# Altium PCB ISL6236A_DEMO_PCB_V1I1.PcbDoc
Units mm, origin at the board's own origin, x right, y up, seen from the top; angles counter-clockwise.
Board outline 50 x 50 mm, 6 copper layers (L1, L2, L3, L4, L5, L6), stack 0.816 mm thick; 41 components, 27 nets, 119 pads, 94 vias.
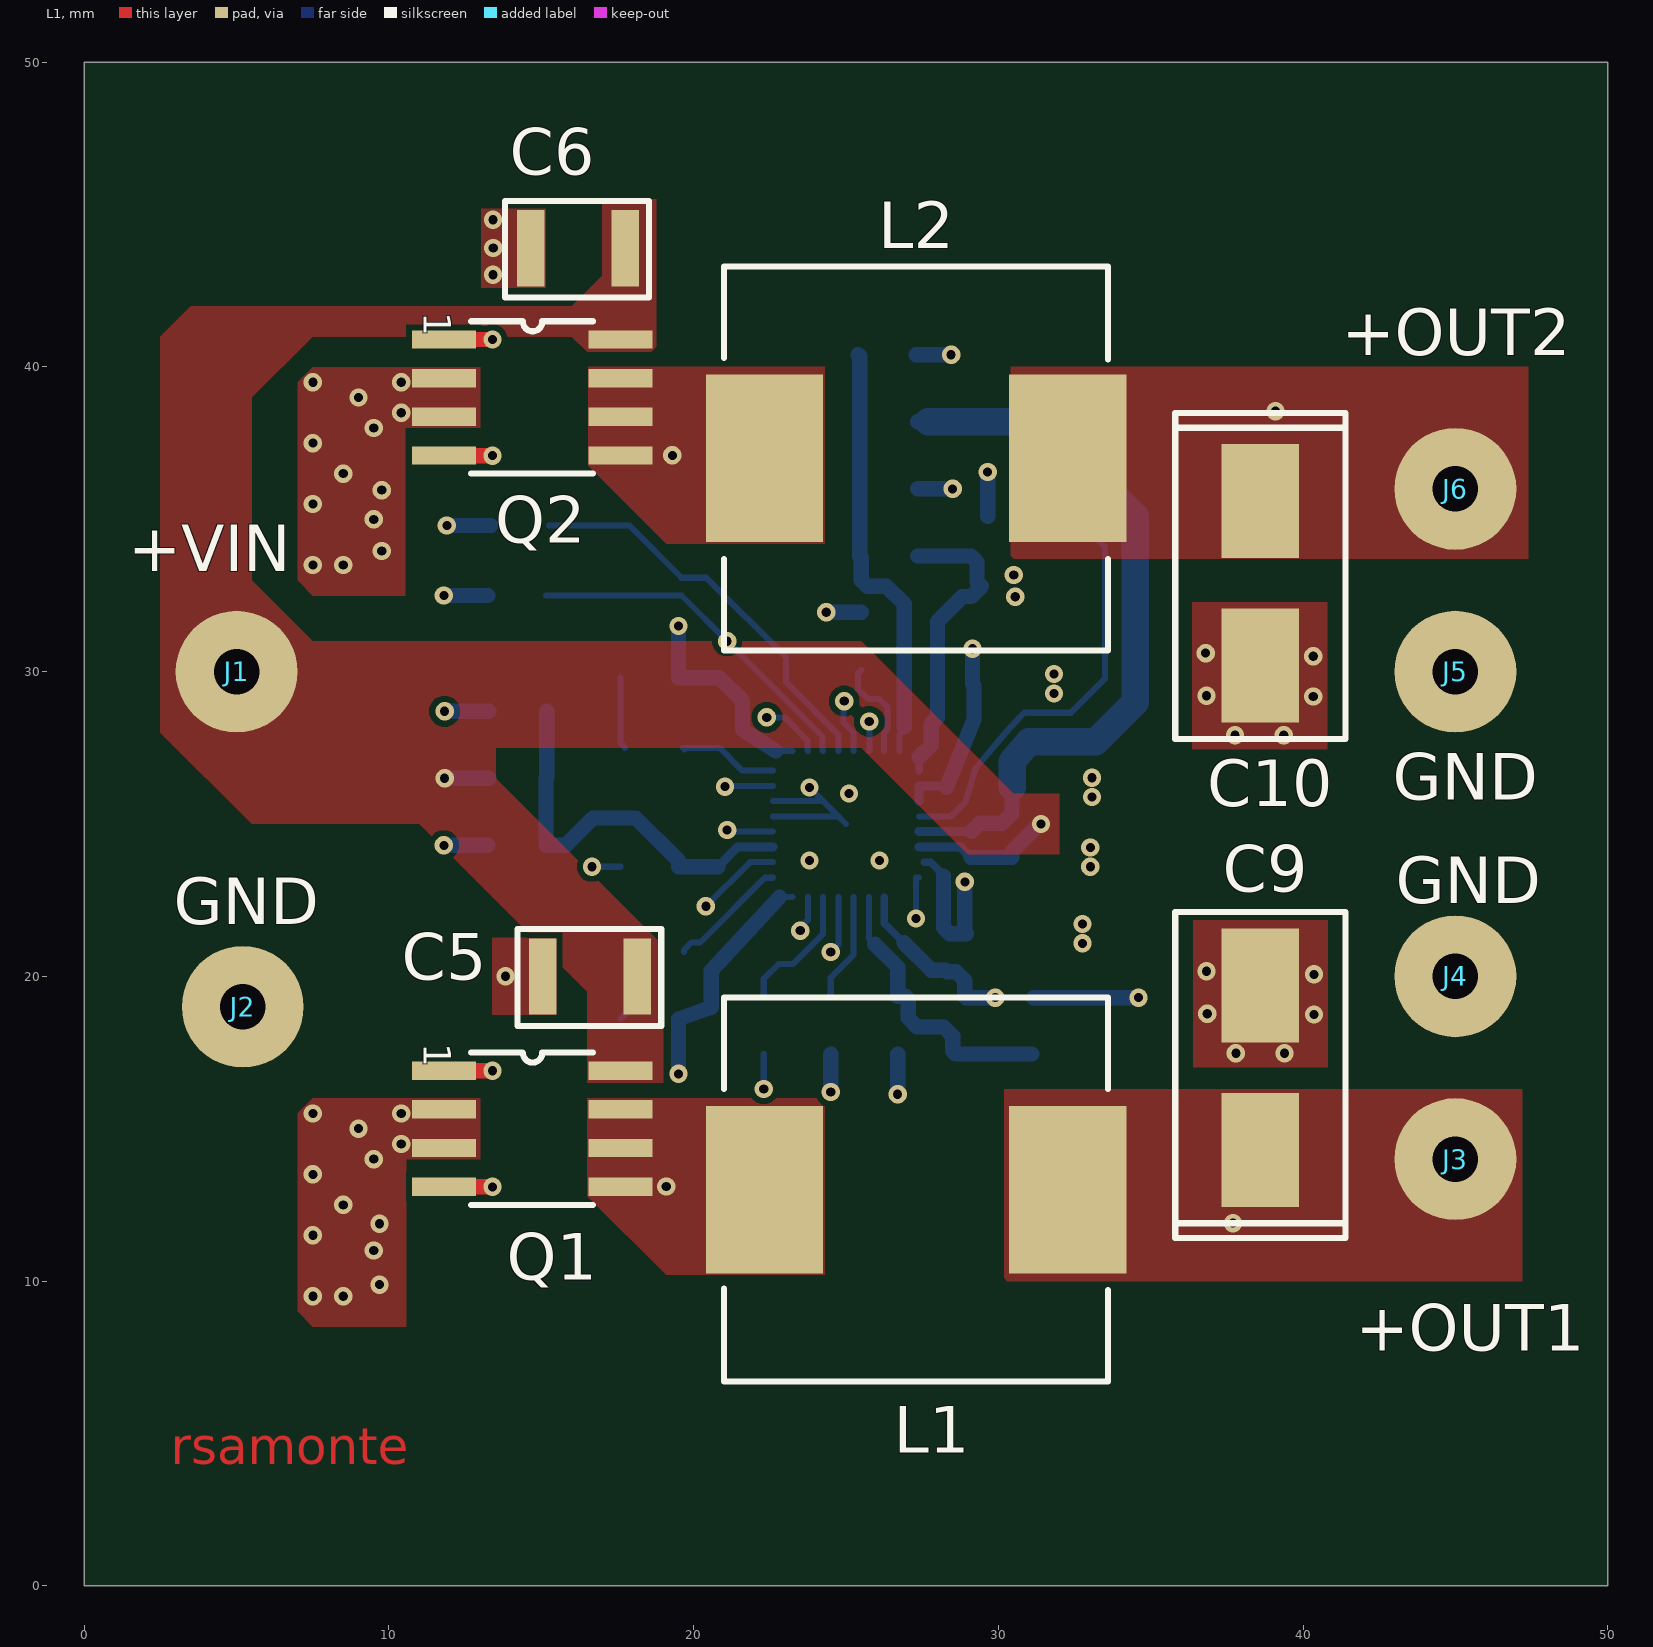
[diagram p0: L1 view]
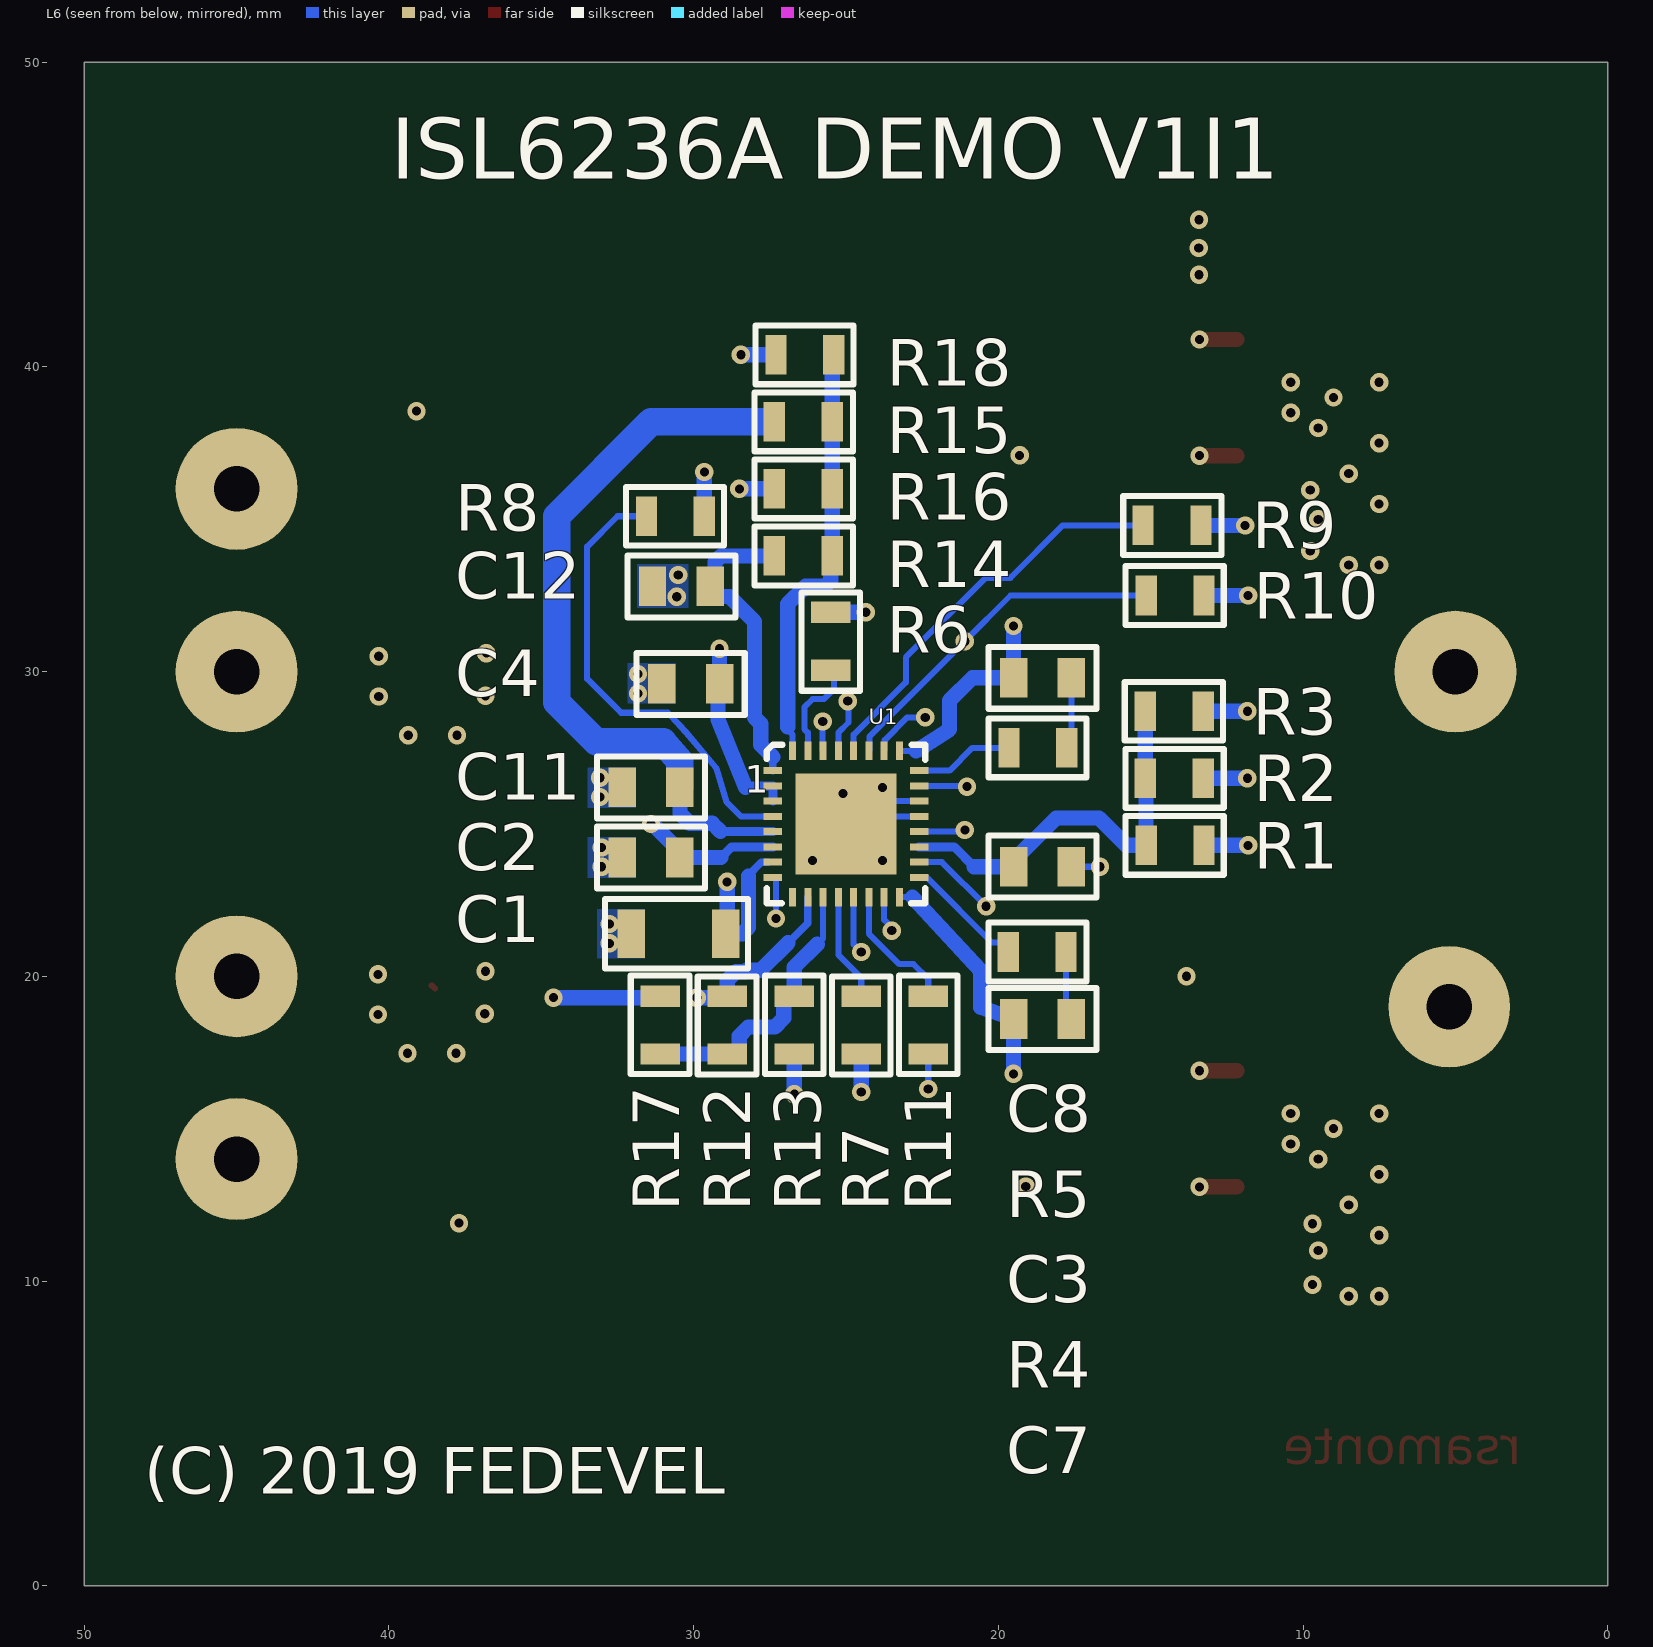
[diagram p1: L6 view, seen from below]
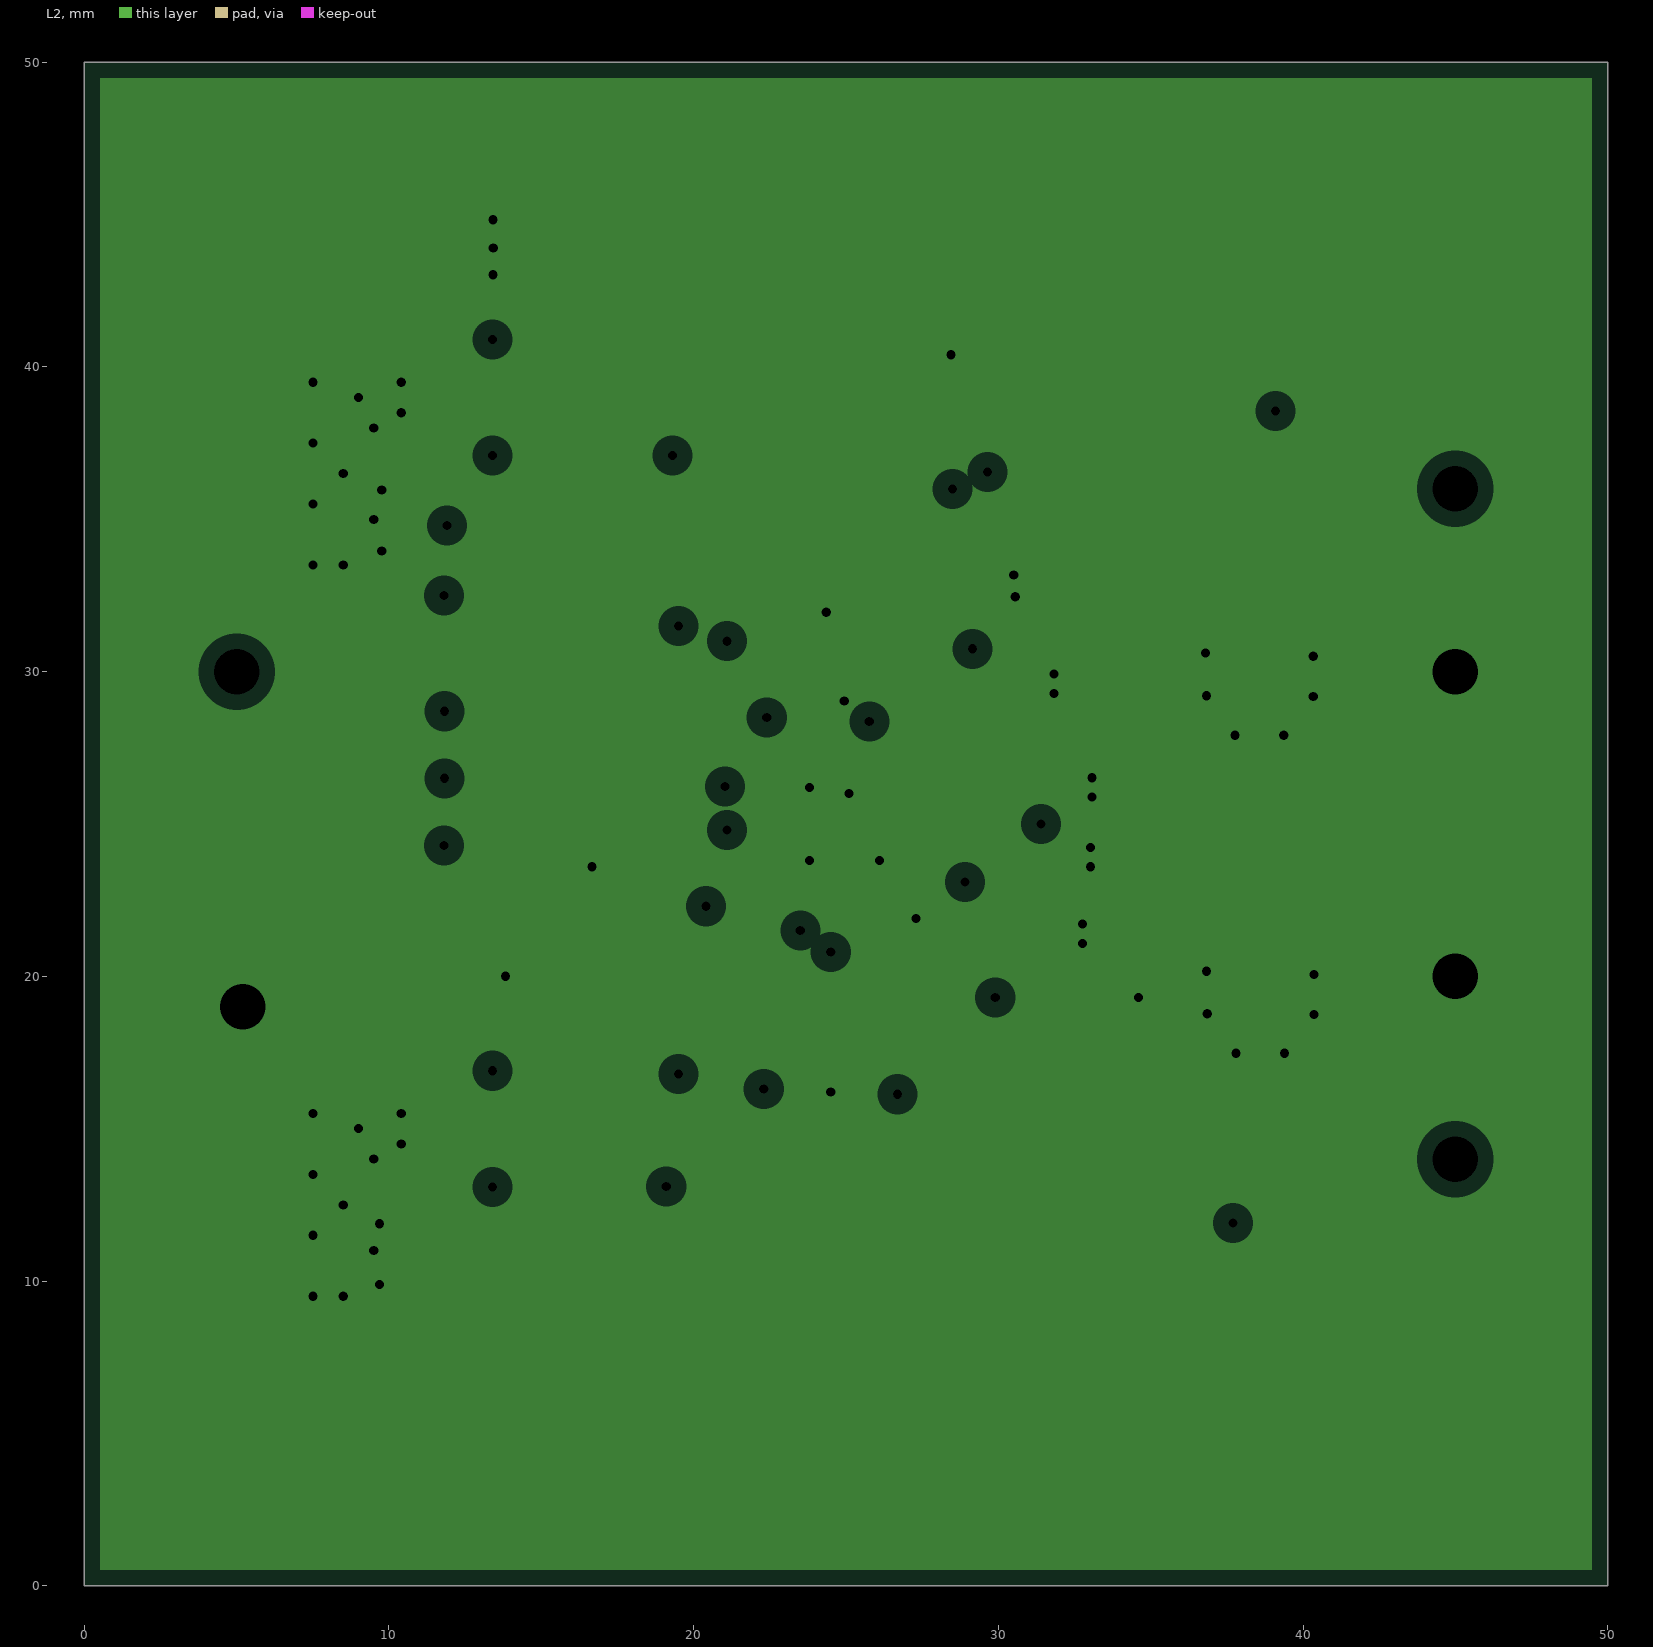
[diagram p2: L2, clearances drawn from the general rule]
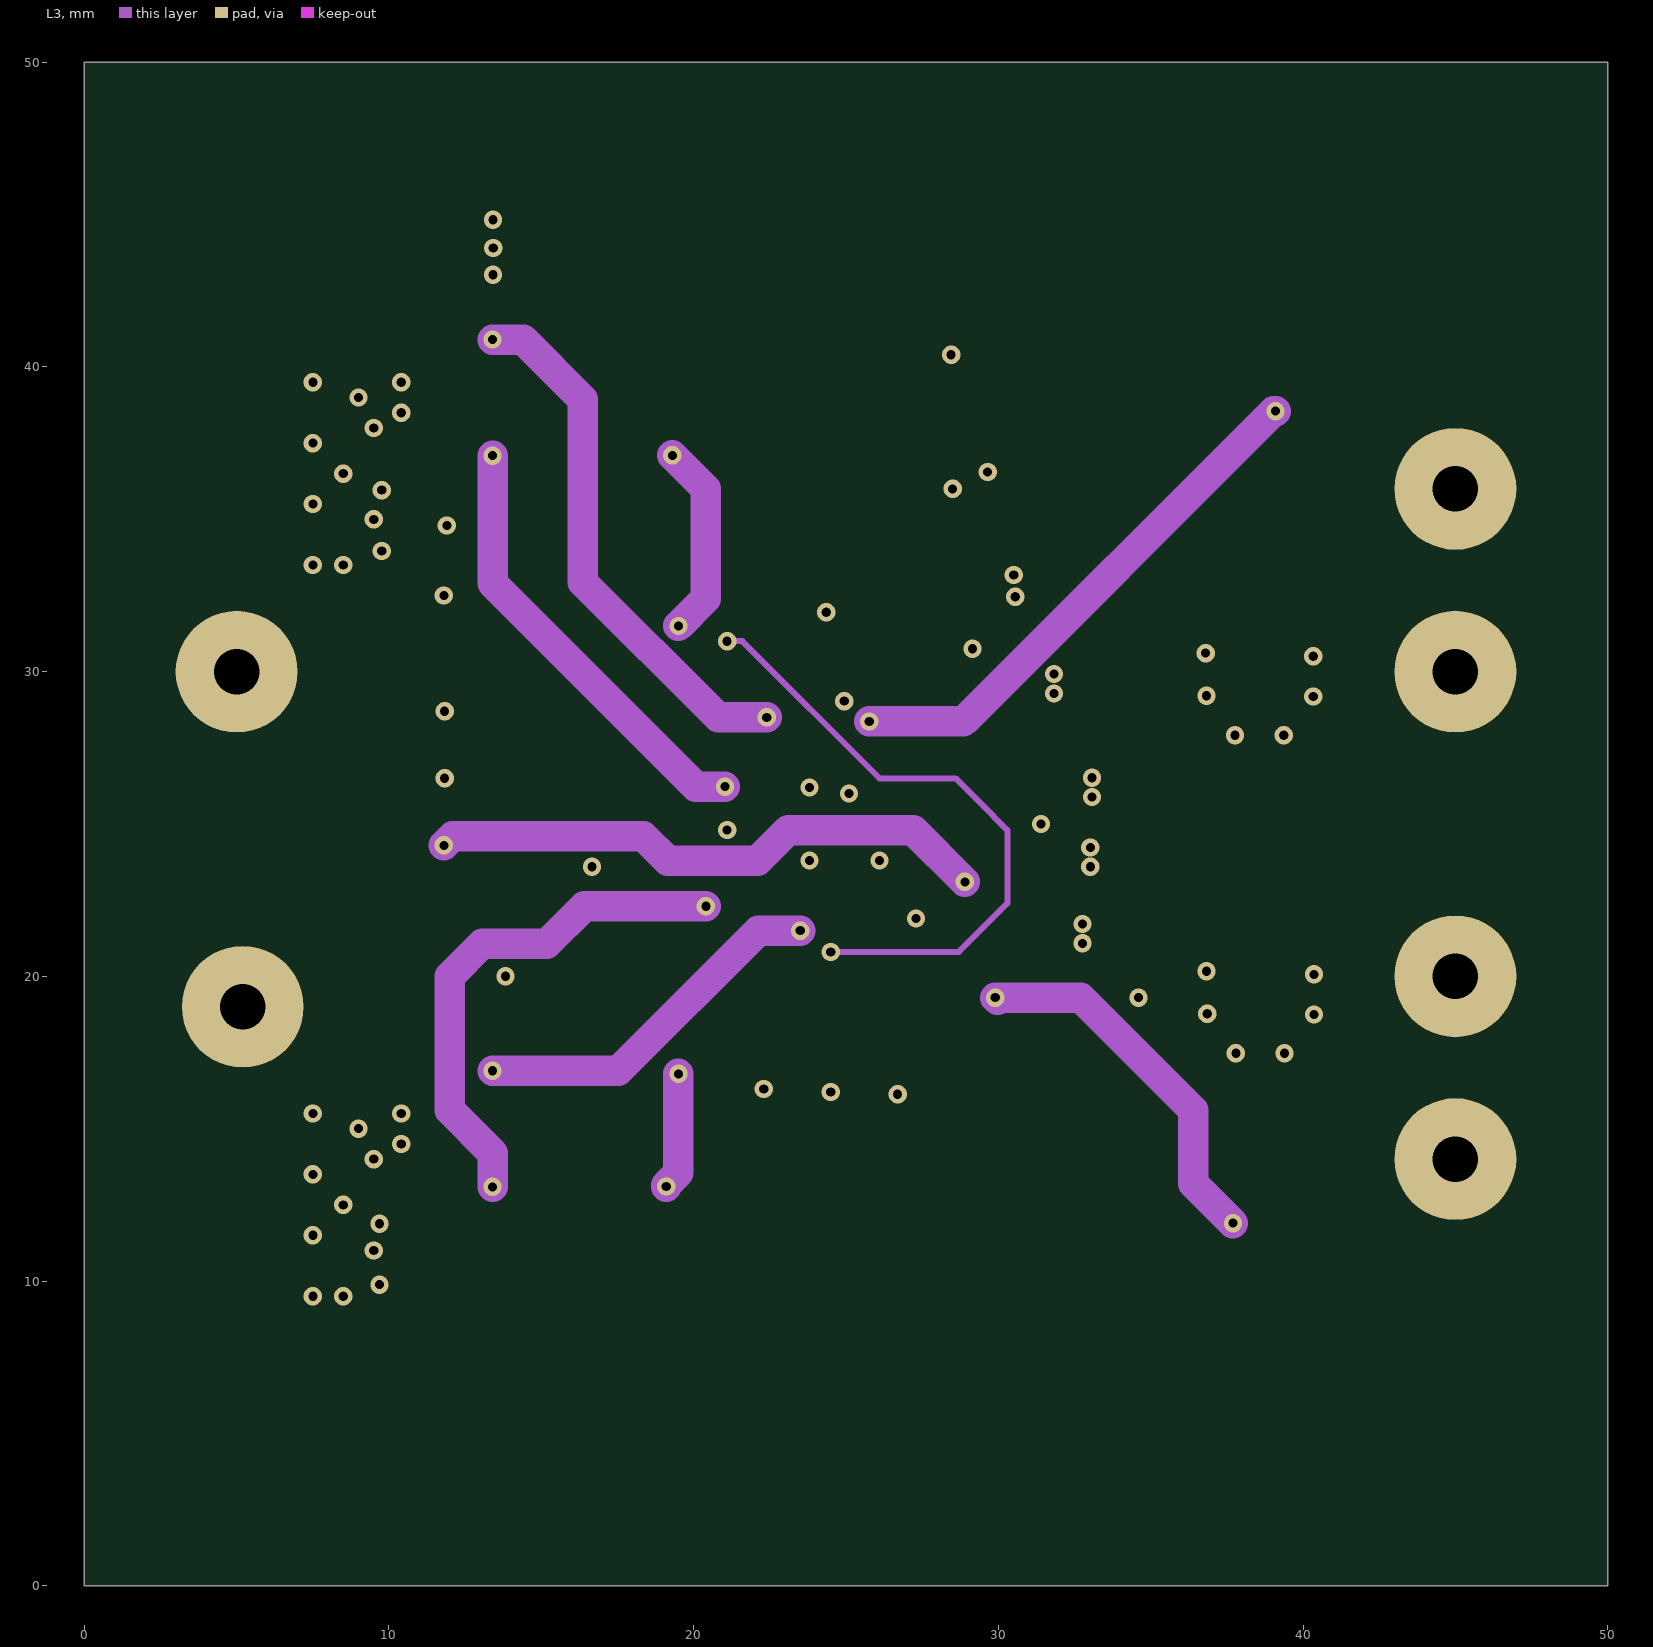
[diagram p3: L3]
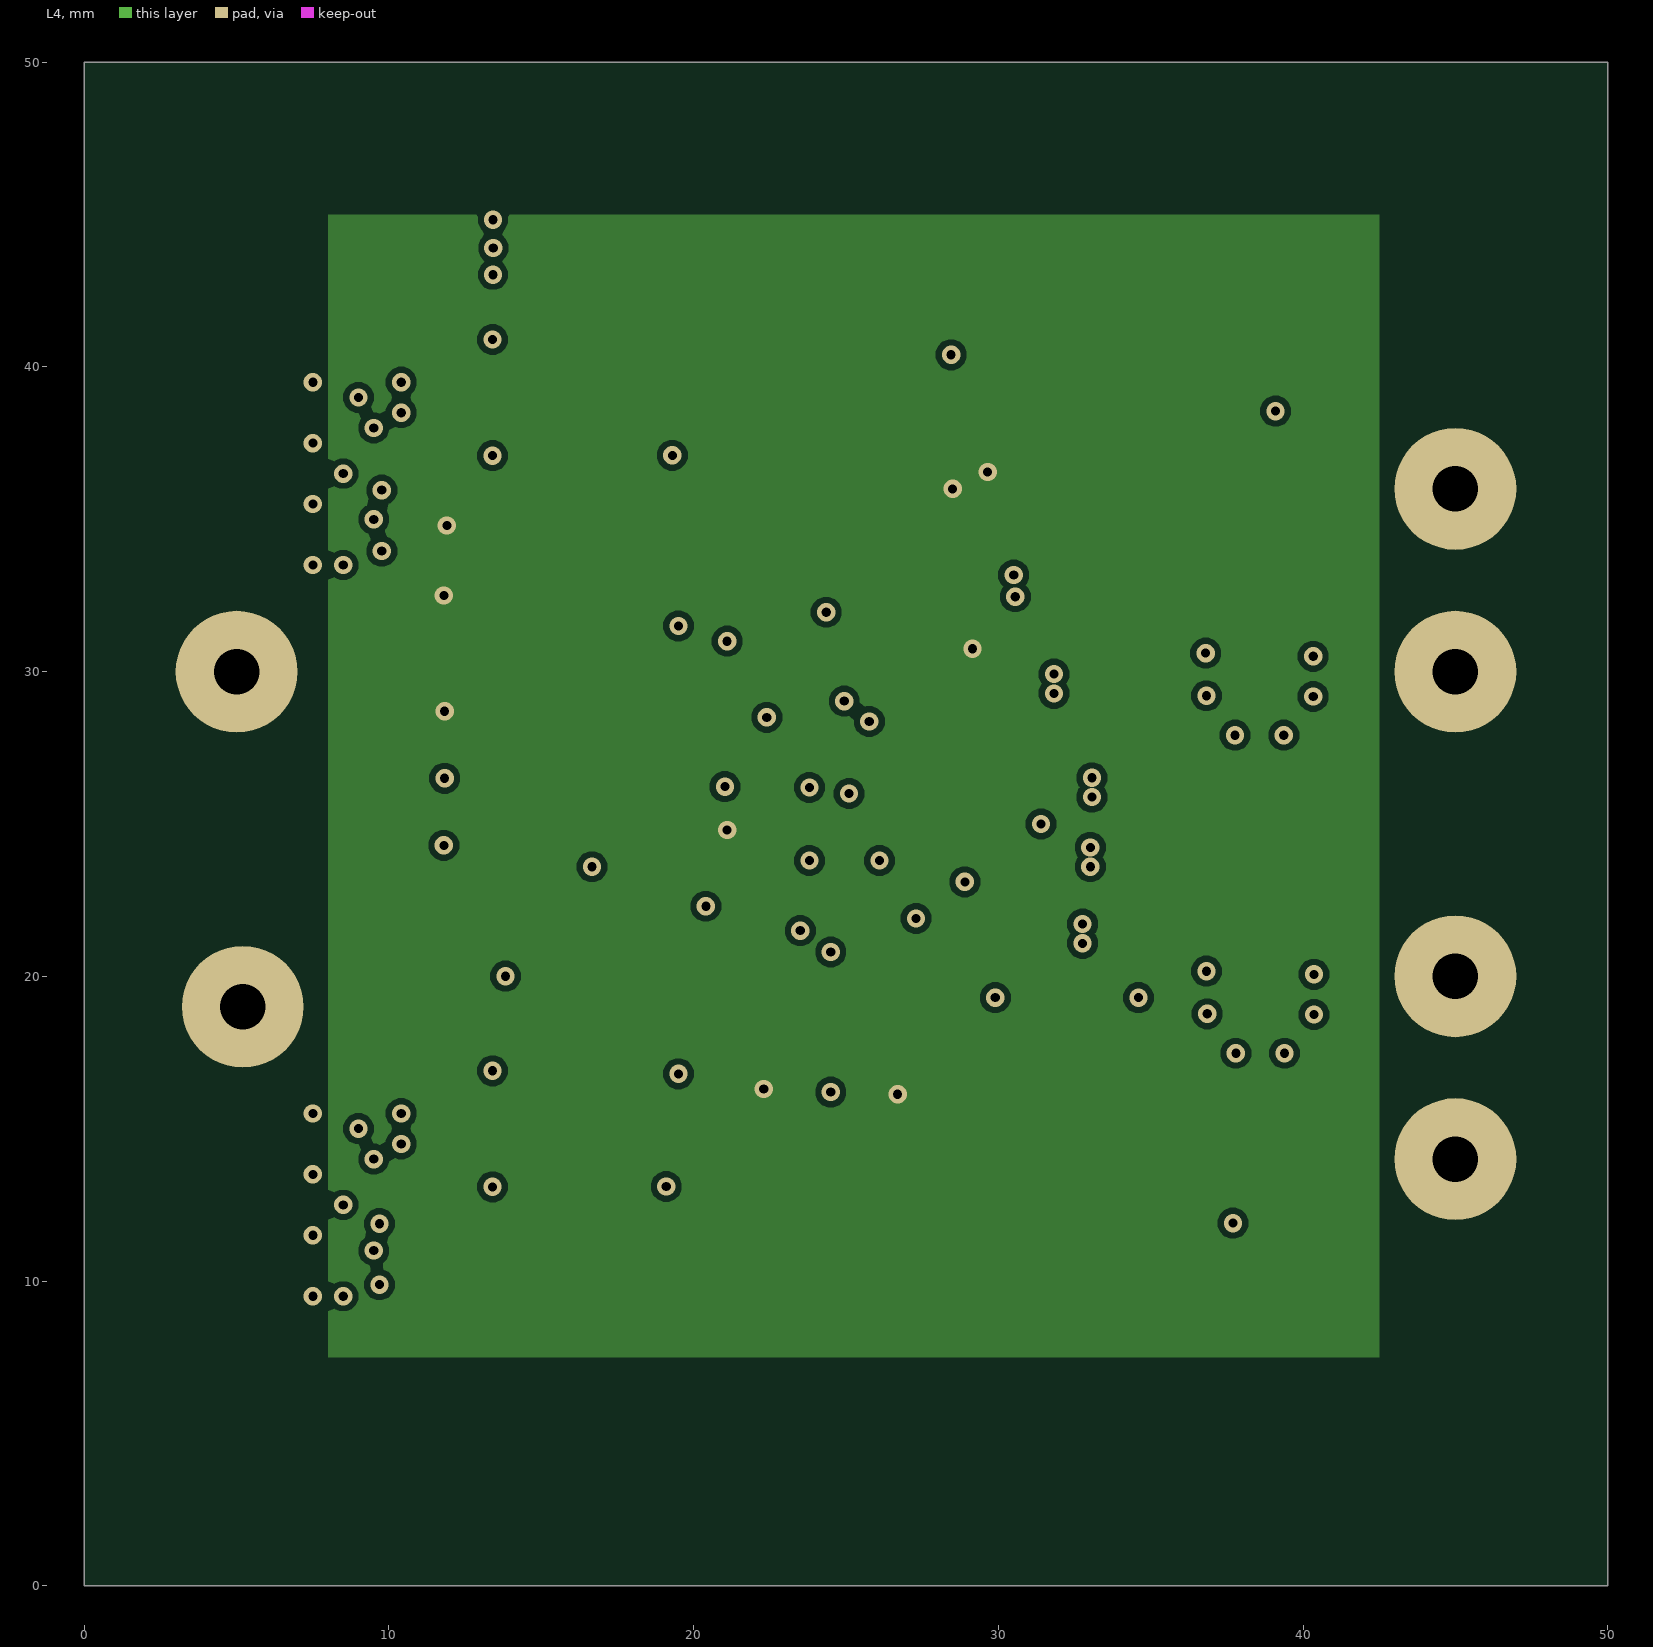
[diagram p4: L4]
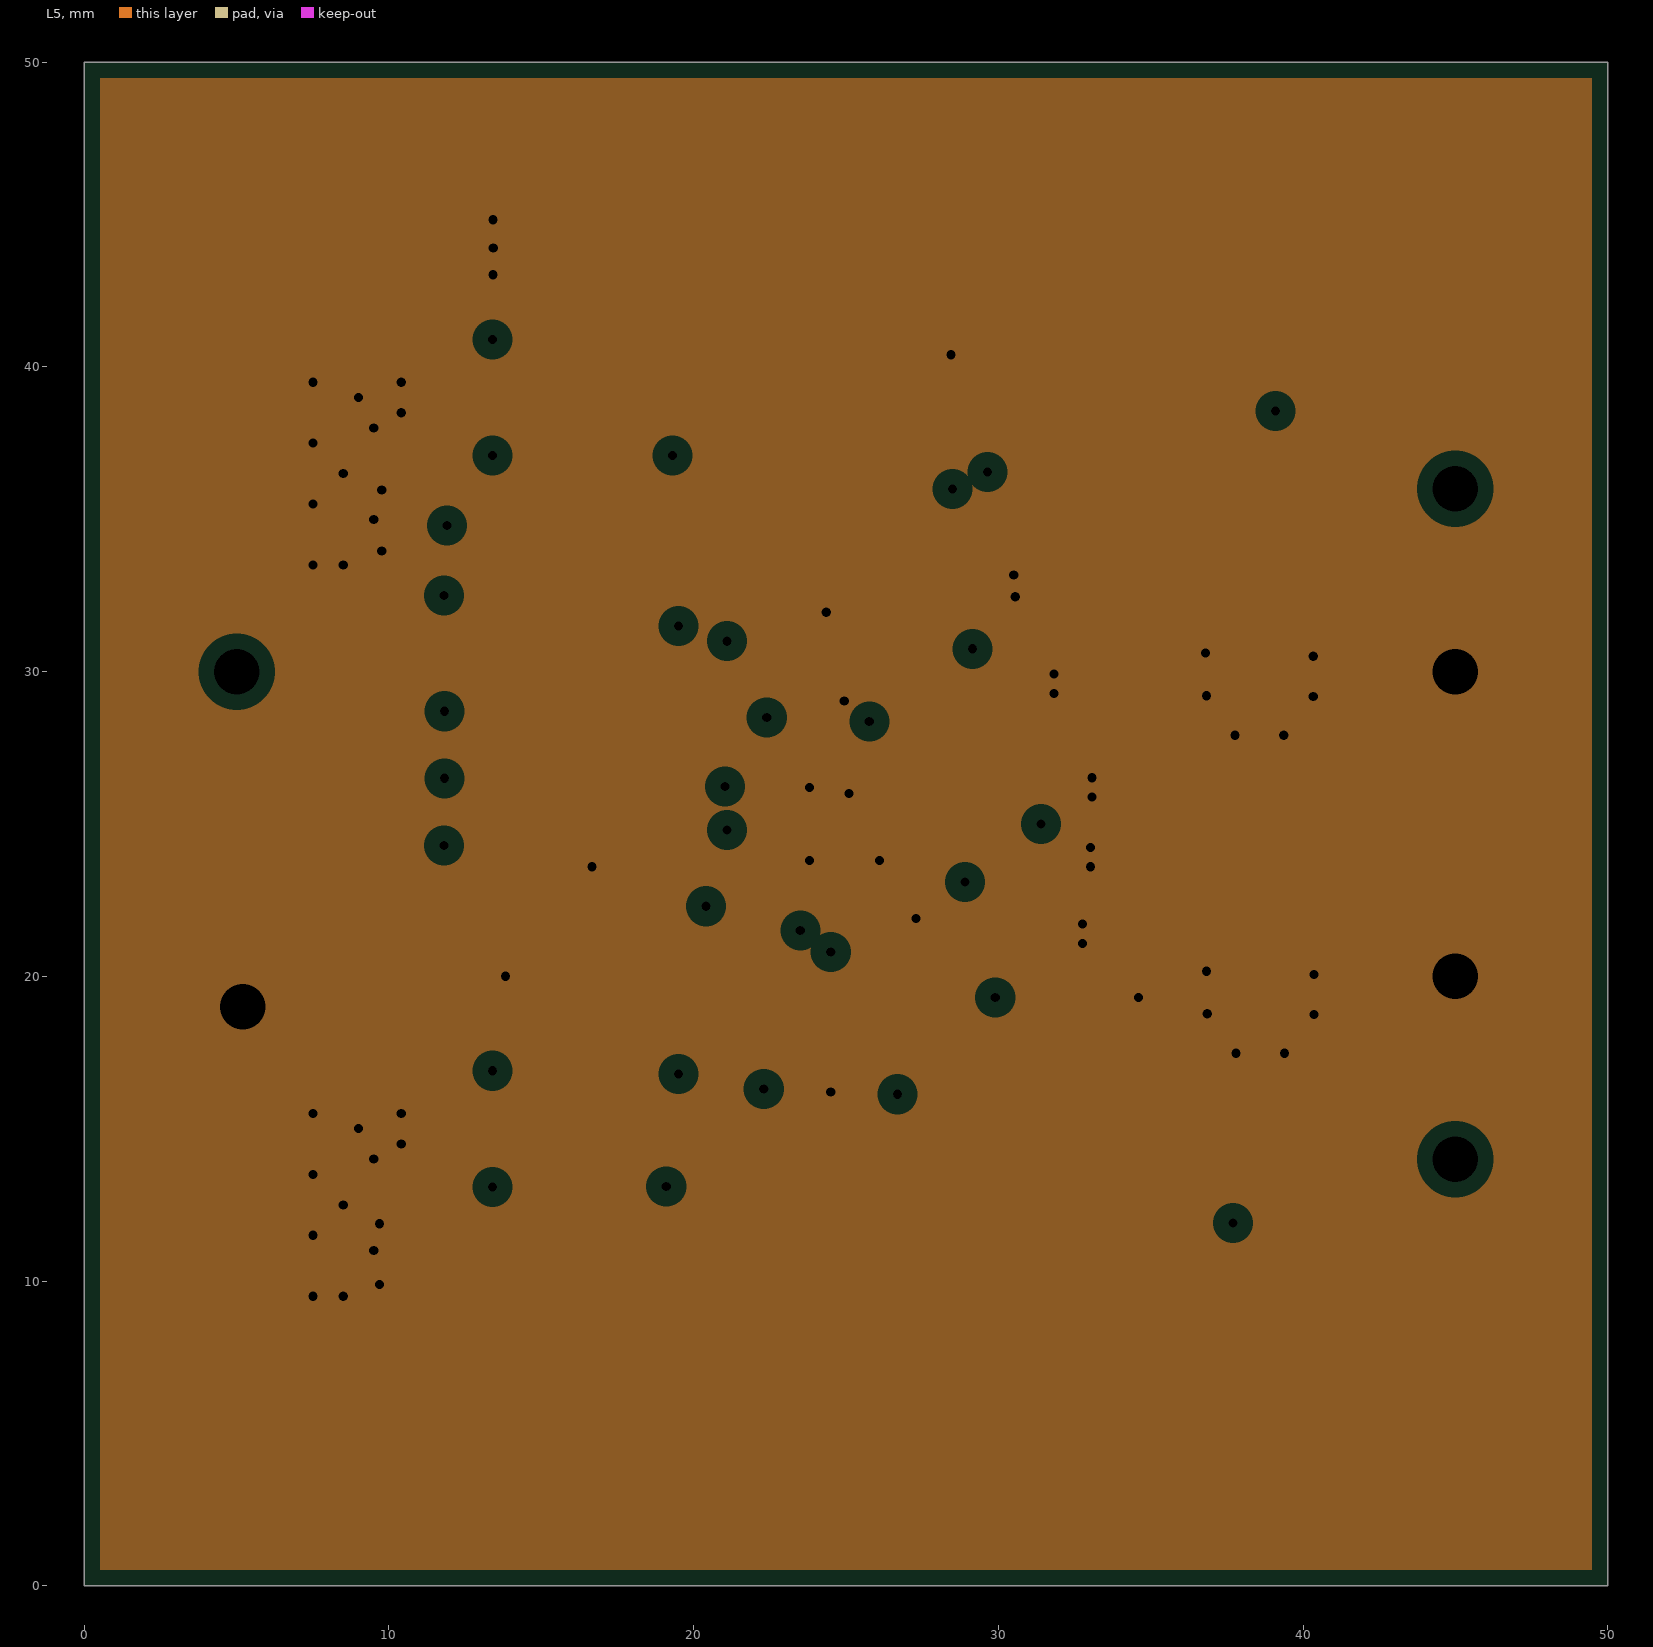
[diagram p5: L5, clearances drawn from the general rule]
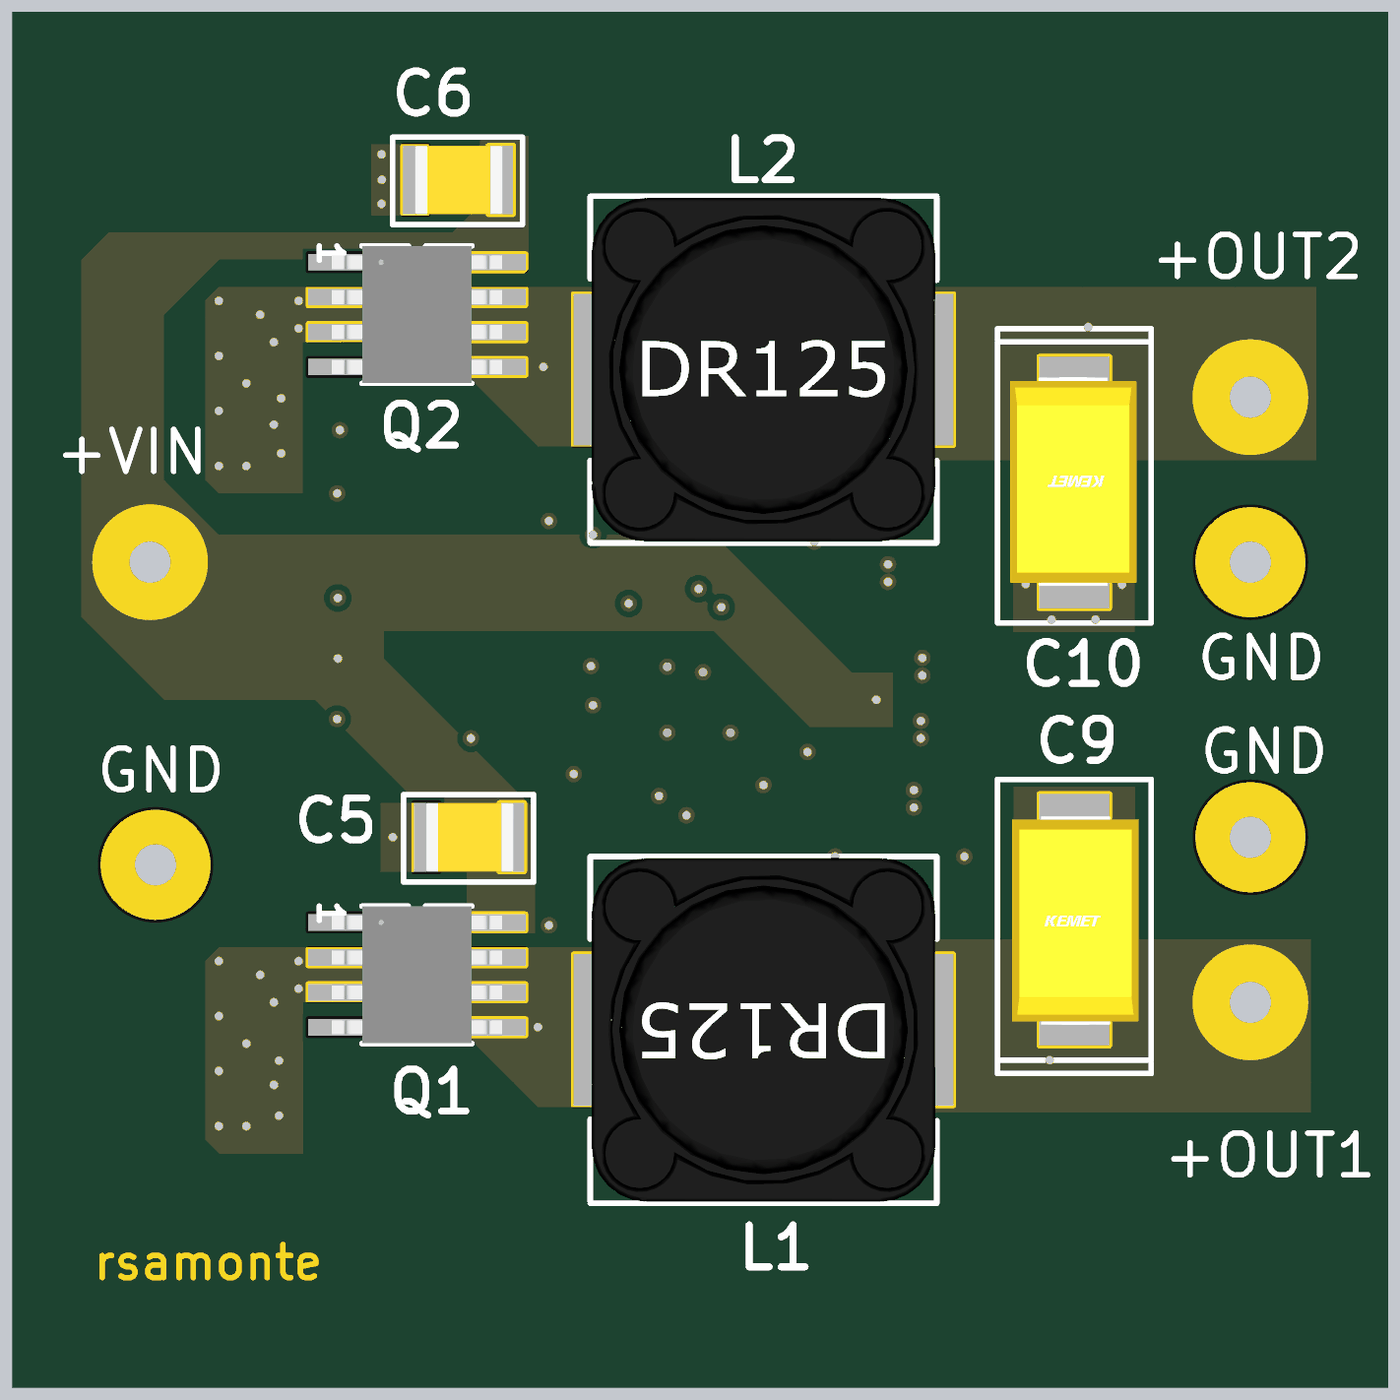
[diagram p6: 3D render of the assembled board from above, using the file's embedded part models]
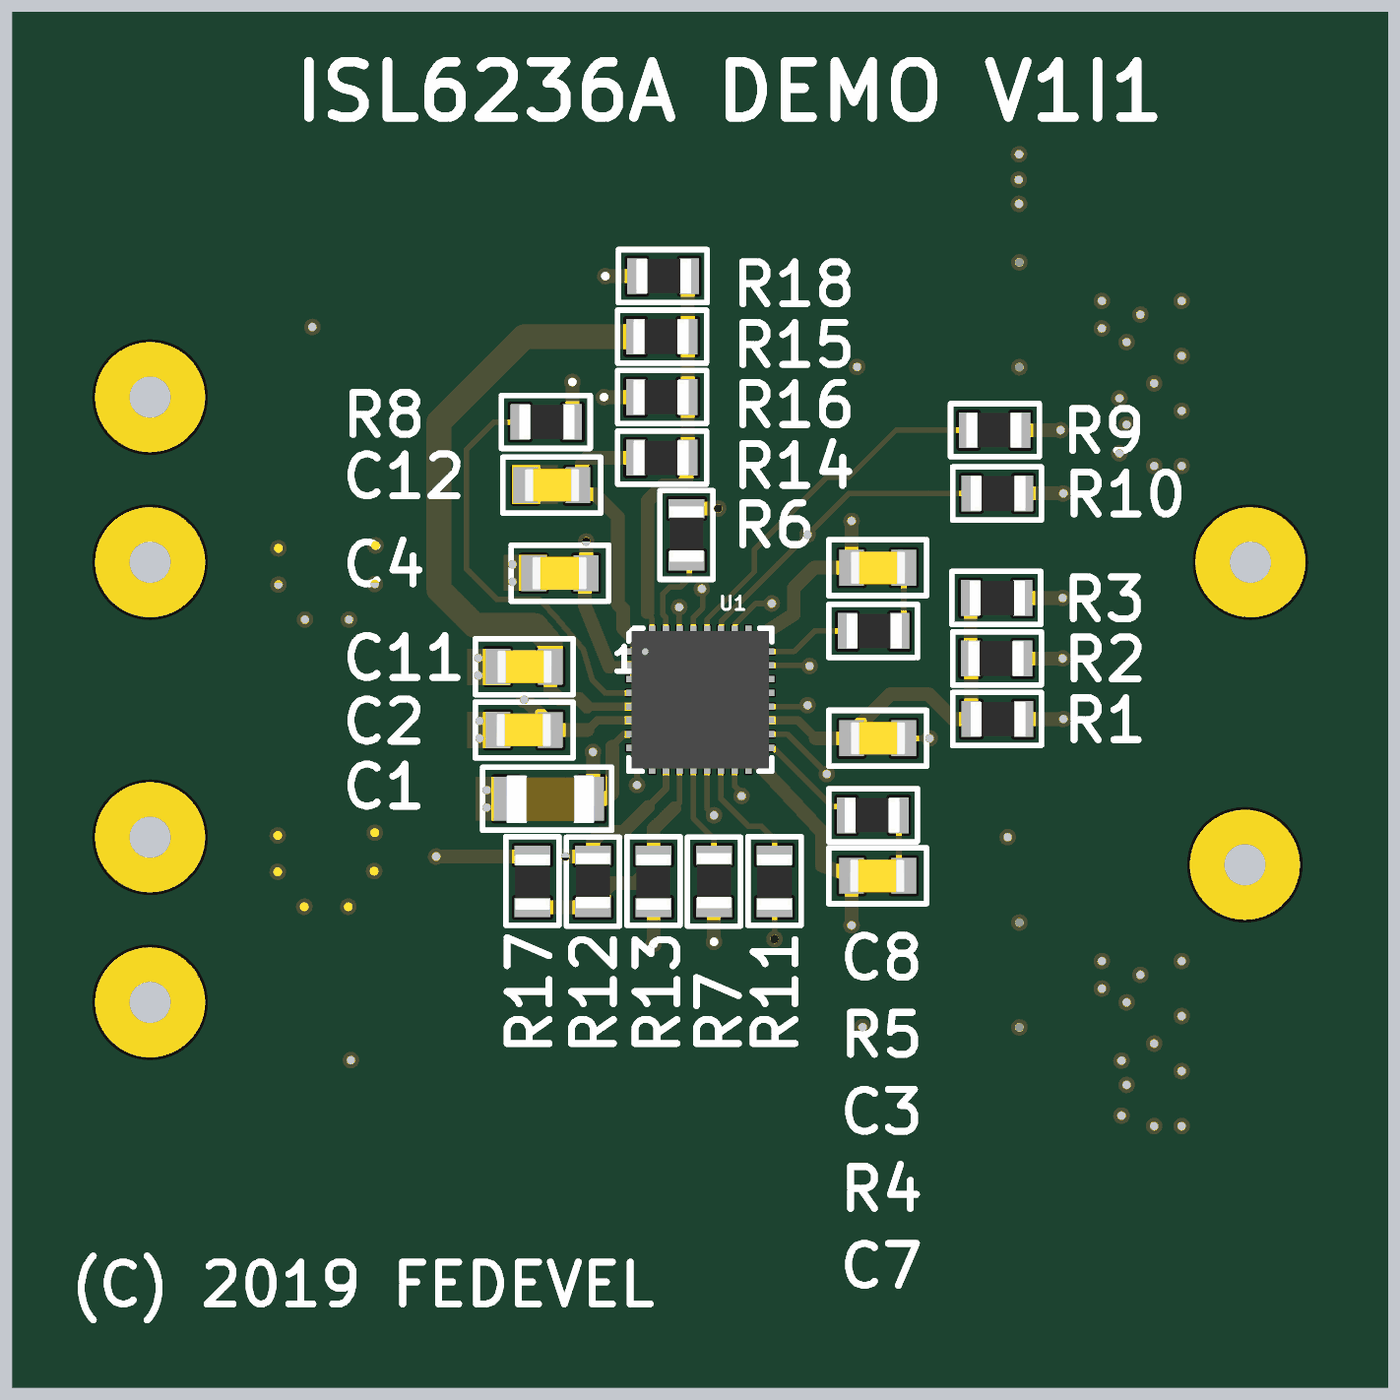
[diagram p7: 3D render of the assembled board from below, using the file's embedded part models]

## Layer stack, top to bottom
Top Solder: solder mask 0.0102, Solder Resist, Dk 3.5
L1: signal copper 0.0356
Dielectric 2: prepreg 0.0711, PP-006, Dk 4.1
L2: plane copper 0.035, net GND
Dielectric 3: prepreg 0.0711, PP-006, Dk 4.1
L3: signal copper 0.035
Dielectric 4: prepreg 0.0711, PP-006, Dk 4.1
L4: signal copper 0.035
Dielectric 5: prepreg 0.0711, PP-006, Dk 4.1
L5: plane copper 0.035, net GND
Dielectric 1: dielectric 0.32, FR-4, Dk 4.8
L6: signal copper 0.0356
Bottom Solder: solder mask 0.0102, Solder Resist, Dk 3.5

## Board outline
0,0 50,0 50,50 0,50

## Design rules (kind name [scope] priority, off if disabled: settings)
Clearance [All] p1: gap=0.2 ignorepadtopadclearanceinfootprint=FALSE
ComponentClearance [All] p1: gap=0.099 collisioncheckmode=3 verticalgap=0.099 showdistances=FALSE
MinimumSolderMaskSliver [All] p1: minsoldermaskwidth=0.1
PlaneClearance [All] p1: clearance=0.508
PlaneConnect [All] p1: pad.planeconnectstyle=Relief pad.reliefexpansion=0.508 pad.reliefentries=4 pad.reliefconductorwidth=1 pad.reliefairgap=0.5 via.planeconnectstyle=Direct via.reliefexpansion=0.508 via.reliefentries=4 via.reliefconductorwidth=0.254 via.reliefairgap=0.254
PolygonConnect [All] p1: connectstyle=Direct reliefconductorwidth=0.254 reliefentries=4 polygonreliefangle="90 Angle" airgapwidth=0.254
RoutingVias [All] p1: holewidth=0.3 width=0.6 viastyle="Through Hole" minholewidth=0.3 minwidth=0.6 maxholewidth=0.3 maxwidth=0.6
SilkToSolderMaskClearance [IsPad] p1: minsilkscreentomaskgap=0.1 clearancetoexposedcopper=TRUE
SolderMaskExpansion [All] p1: expansion=0.102 istentingtop=FALSE
Width [All] p1: maxlimit=10 minlimit=0.2 preferedwidth=0.2
25 further rules are at their usual default settings.

## Components (designator, comment, footprint, x,y, rotation, side; value= is the part's Value field where it differs from the comment)
C1 "4.7uF 50V" C1206 30.5,21.4 r180 bottom
C2 "1uF 50V" C0805 31.4,23.9 r180 bottom
C3 "1uF 50V" C0805 18.55,23.6 r0 bottom
C4 "1uF 50V" C0805 30.1,29.6 r180 bottom
C5 "10uF, 35V" C1210 16.6,20 r0 top
C6 "10uF, 35V" C1210 16.2,43.9 r0 top
C7 "100nF" C0805 18.55,18.6 r180 bottom
C8 "220nF" C0805 18.55,29.8 r0 bottom
C9 "330uF. 10V" 7343-43 38.6,17 r90 top
C10 "330uF. 10V" 7343-43 38.6,32.9 r270 top
C11 "10nF" C0805 31.4,26.2 r0 bottom
C12 "100nF" C0805 30.4,32.8 r0 bottom
J1 "4MMx1.5MM" PAD_WITH_HOLE_4MMx1MM5 5,30 r0 top
J2 "4MMx1.5MM" PAD_WITH_HOLE_4MMx1MM5 5.2,19 r0 top
J3 "4MMx1.5MM" PAD_WITH_HOLE_4MMx1MM5 45,14 r0 top
J4 "4MMx1.5MM" PAD_WITH_HOLE_4MMx1MM5 45,20 r0 top
J5 "4MMx1.5MM" PAD_WITH_HOLE_4MMx1MM5 45,30 r0 top
J6 "4MMx1.5MM" PAD_WITH_HOLE_4MMx1MM5 45,36 r0 top
L1 "3.3uH DR125-3R3-R" DR125 27.3,13 r180 top
L2 "2.2uH DR125-2R2-R" DR125 27.3,37 r0 top
Q1 "SI4816BDY-T1-E3" SO-8 14.7,15 r0 top
Q2 "SI4816BDY-T1-E3" SO-8 14.7,39 r0 top
R1 "OR" R0805 14.2,24.3 r180 bottom
R2 "OR" R0805 14.225,26.5 r0 bottom
R3 "10R" R0805 14.225,28.7 r180 bottom
R4 "1R" R0805 18.728,20.8 r0 bottom
R5 "1R" R0805 18.702,27.5 r180 bottom
R6 "200K" R0805 25.5,31 r90 bottom
R7 "200K" R0805 24.5,18.4 r90 bottom
R8 "10K" R0805 30.6,35.1 r180 bottom
R9 "200K" R0805 14.3,34.8 r0 bottom
R10 "200K" R0805 14.2,32.5 r180 bottom
R11 "10K" R0805 22.3,18.4 r270 bottom
R12 "DNF" R0805 28.9,18.4 r90 bottom
R13 "OR" R0805 26.7,18.4 r270 bottom
R14 "DNF" R0805 26.4,33.8 r0 bottom
R15 "OR" R0805 26.4,38.2 r0 bottom
R16 "DNF" R0805 26.4,36 r0 bottom
R17 "DNF" R0805 31.1,18.4 r270 bottom
R18 "DNF" R0805 26.35,40.4 r180 bottom
U1 "ISL6236AIRZ" L32.5x5B 25,25 r180 bottom

## Footprints (in the part's own frame and the unit in brackets; to place one, negate y for a bottom-side part, rotate by r counter-clockwise, add the part's x,y. Pads: shape width x height; smd on the part's side, far side on the other; paste and mask are expansions set on the pad)
7343-43 [mm]
  rect 3.75x2.55 smd: 1(-2.7,0) 2(2.7,0)
  silkscreen extent -5.59,-2.79 5.11,2.79, body extent -3.83,-2.34 3.77,2.26, height 4.25
C0805 [mm]
  rect 0.9x1.3 smd: 1(-0.95,0) 2(0.95,0)
  silkscreen extent -1.78,-1.02 1.78,1.02, body extent -1.02,-0.6 0.98,0.6, height 1.46
C1206 [mm]
  rect 0.9x1.6 smd: 1(-1.55,0) 2(1.55,0)
  silkscreen extent -2.41,-1.14 2.29,1.14, body extent -1.55,-0.89 1.65,0.85, height 1.71
C1210 [mm]
  rect 0.9x2.5 smd: 1(-1.55,0) 2(1.549,0)
  silkscreen extent -2.39,-1.63 2.34,1.55, body extent -1.57,-1.25 1.63,1.25, height 1.01
DR125 [mm]
  rect 3.85x5.5 smd: 1(-4.975,0) 2(4.975,0)
  silkscreen extent -6.3,-6.3 6.3,6.3, body extent -6.25,-6.25 6.25,6.25, height 7.76
L32.5x5B [mm]
  rect 0.6x0.23 smd mask+0.051: 1(-2.4,1.75) 2(-2.4,1.25) 3(-2.4,0.75) 4(-2.4,0.25) 5(-2.4,-0.25) 6(-2.4,-0.75) 7(-2.4,-1.25) 8(-2.4,-1.75) 17(2.4,-1.75) 18(2.4,-1.25) 19(2.4,-0.75) 20(2.4,-0.25) 21(2.4,0.25) 22(2.4,0.75) 23(2.4,1.25) 24(2.4,1.75)
  rect 0.23x0.6 smd mask+0.051: 9(-1.75,-2.4) 10(-1.25,-2.4) 11(-0.75,-2.4) 12(-0.25,-2.4) 13(0.25,-2.4) 14(0.75,-2.4) 15(1.25,-2.4) 16(1.75,-2.4) 25(1.75,2.4) 26(1.25,2.4) 27(0.75,2.4) 28(0.25,2.4) 29(-0.25,2.4) 30(-0.75,2.4) 31(-1.25,2.4) 32(-1.75,2.4)
  rect 3.3x3.3 smd mask+0.051: 33(0,0)
  silkscreen extent -2.6,-2.6 2.6,2.6, body extent -2.5,-2.5 2.5,2.5, height 0.99
PAD_WITH_HOLE_4MMx1MM5 [mm]
  round 4 hole 1.5: 1(0,0)
R0805 [mm]
  rect 0.7x1.3 smd: 1(-0.95,0) 2(0.95,0)
  silkscreen extent -1.63,-0.97 1.6,0.97, body extent -0.97,-0.63 1.03,0.63, height 0.61
SO-8 [mm]
  rect 2.1x0.6 smd: 1(-2.9,1.905) 2(-2.9,0.635) 3(-2.9,-0.635) 4(-2.9,-1.905) 5(2.9,-1.905) 6(2.9,-0.635) 7(2.9,0.635) 8(2.9,1.905)
  silkscreen extent -2,-2.5 2,2.5, body extent -3.1,-2.49 3.1,2.49, height 1.76

## Part data
C1: library part C3216X5R1H475K160AB, "C Series 1206 4.7 uF 50 V ±10 % Tolerance X5R SMT Multilayer Ceramic Capacitor", Capacitance=4.7uF, Case Code (Imperial)=1206, Case Code (Metric)=3216, Dielectric=X5R, Dielectric Material=Ceramic, Manufacturer=TDK, Max Operating Temperature=85°C, Min Operating Temperature=-55°C, Package Quantity=1, Supplier Part Number 1=445-5994-1-ND, Tolerance=10%, Voltage Rating=50V, Case/Package=1206, Category="Ceramic Capacitors", ComponentLink1Description=https://datasheet.ciiva.com/24216/c3216x5r1h475k160ab-265269-24216325.pdf?src-supplier=Mouser, ComponentLink1URL=https://datasheet.ciiva.com/24216/c3216x5r1h475k160ab-265269-24216325.pdf?src-supplier=Mouser, ComponentLink2Description=https://datasheet.ciiva.com/6286/tdkmlcccaprange-6286230.pdf?src-supplier=Digi-Key, ComponentLink2URL=https://datasheet.ciiva.com/6286/tdkmlcccaprange-6286230.pdf?src-supplier=Digi-Key, ComponentLink3Description=https://datasheet.ciiva.com/6286/tdkmlcccaprange-6286233.pdf?src-supplier=Digi-Key, ComponentLink3URL=https://datasheet.ciiva.com/6286/tdkmlcccaprange-6286233.pdf?src-supplier=Digi-Key, ComponentLink4Description=https://datasheet.ciiva.com/6286/tdkmlcccaprange-6286236.pdf?src-supplier=Digi-Key, ComponentLink4URL=https://datasheet.ciiva.com/6286/tdkmlcccaprange-6286236.pdf?src-supplier=Digi-Key, Construction=Flat, Depth=1.6mm, Height=1.6mm, Lead Free="Lead Free", Length=3.2mm, Manufacturer Part Number=C3216X5R1H475K160AB, Mount="Surface Mount", Packaging="Tape and Reel", Pricing 1="1=0.82000, 10=0.60400, 50=0.48300, 100=0.41400, 500=0.32776, 1000=0.27600 (USD)", Resistor Type=Ceramic, RoHS=Yes, RoHS Compliant=Yes, Series=C, Stock 1=8622, Supplier 1=Digi-Key, Termination=SMD/SMT, Thickness=0.071inch, Voltage Rating (DC)=50V, Weight=0.000571oz, Width=1.6mm
C2 C3 C4: library part CL21B105KBFNNNG, "Cap Ceramic 1uF 50V X7R 10% SMD 0805 125°C Embossed Plastic T/R", Capacitance=1uF, Case Code (Imperial)=0805, Case Code (Metric)=2012, Dielectric=X7R, Manufacturer=Samsung, Max Operating Temperature=125°C, Min Operating Temperature=-55°C, Package Quantity=3000, Supplier Part Number 1=1276-6470-1-ND, Tolerance=10%, Voltage=50V, Case/Package=0805, Category="Ceramic Capacitors", ComponentLink1Description=https://datasheet.ciiva.com/25733/cl21b105kbfnnng-25733278.pdf?src-supplier=Digi-Key, ComponentLink1URL=https://datasheet.ciiva.com/25733/cl21b105kbfnnng-25733278.pdf?src-supplier=Digi-Key, ComponentLink2Description=https://datasheet.ciiva.com/29199/455898-da-01-en-vs-kondensator-0805-29199201.pdf?src-supplier=Conrad, ComponentLink2URL=https://datasheet.ciiva.com/29199/455898-da-01-en-vs-kondensator-0805-29199201.pdf?src-supplier=Conrad, ComponentLink3Description=https://datasheet.ciiva.com/26310/mlcc-catalogdownload2013-eng-26310125.pdf?src-supplier=Distrelec, ComponentLink3URL=https://datasheet.ciiva.com/26310/mlcc-catalogdownload2013-eng-26310125.pdf?src-supplier=Distrelec, ComponentLink4Description=https://datasheet.ciiva.com/16428/cl05b104kq5nnnc-16428872.pdf?src-supplier=Future+Electronics, ComponentLink4URL=https://datasheet.ciiva.com/16428/cl05b104kq5nnnc-16428872.pdf?src-supplier=Future+Electronics, Construction=Flat, Contact Plating=Tin, Depth=1.25mm, Length=2mm, Manufacturer Part Number=CL21B105KBFNNNG, Material=Ceramic, Mount="Surface Mount", Packaging="Tape and Reel", Pricing 1="1=0.13000, 10=0.09000, 50=0.05120, 100=0.04250, 500=0.02978, 1000=0.02465 (USD)", RoHS=Yes, RoHS Compliant=Yes, Series=CL, Stock 1=151690, Supplier 1=Digi-Key, Termination=Wraparound, Thickness=0.053inch, Voltage Rating=50V, Width=0.049inch
C5 C6: library part C1210C106K6PACTU, "1210 C 10uF Ceramic Multilayer Capacitor; 35 VDC; +85degC; X5R Dielec; +/-10%", Capacitance=10uF, Case Code (Imperial)=1210, Case Code (Metric)=3225, Dielectric=X5R, Dielectric Material=Ceramic, Manufacturer=KEMET, Max Operating Temperature=85°C, Min Operating Temperature=-55°C, Supplier Part Number 1=399-12070-1-ND, Tolerance=10%, Voltage=35V, Case/Package=1210, Category="Ceramic Capacitors", ComponentLink1Description=http://www.farnell.com/datasheets/2741192.pdf?src-supplier=Farnell, ComponentLink1URL=http://www.farnell.com/datasheets/2741192.pdf?src-supplier=Farnell, ComponentLink2Description=http://www.alliedelec.com/m/d/f3c02ddb98afa3dd1adcb801109671e9.pdf?src-supplier=Allied+Electronics, ComponentLink2URL=http://www.alliedelec.com/m/d/f3c02ddb98afa3dd1adcb801109671e9.pdf?src-supplier=Allied+Electronics, ComponentLink3Description=https://api.kemet.com/component-edge/download/datasheet/C1210C106K6PAC7800.pdf?src-supplier=Digi-Key, ComponentLink3URL=https://api.kemet.com/component-edge/download/datasheet/C1210C106K6PAC7800.pdf?src-supplier=Digi-Key, ComponentLink4Description=http://www.kemet.com/docfinder?Partnumber=C1210C106K6PAC7800&src-supplier=Digi-Key, ComponentLink4URL=http://www.kemet.com/docfinder?Partnumber=C1210C106K6PAC7800&src-supplier=Digi-Key, ComponentLink5Description=http://www.farnell.com/datasheets/2741192.pdf?src-supplier=Newark, ComponentLink5URL=http://www.farnell.com/datasheets/2741192.pdf?src-supplier=Newark, Depth=2.5mm, Dissipation Factor=2.5%, Height=1.9mm, Lead Free="Lead Free", Length=0.126inch, Manufacturer Part Number=C1210C106K6PACTU, Mount="Surface Mount", Packaging="Tape and Reel", Pricing 1="1=0.74000, 10=0.54900, 50=0.43880, 100=0.37620, 500=0.29782, 1000=0.25079 (USD)", RoHS=Yes, RoHS Compliant=Yes, Stock 1=1579, Supplier 1=Digi-Key, Termination=Solder, Thickness=0.083inch, Voltage Rating=35V, Voltage Rating (DC)=35V, Width=0.098inch
C7 C12: library part C0805C104K5RACTU, "Cap Ceramic 0.1uF 50V X7R 10% SMD 2.0 x 1.2 mm 125 C Paper T/R", Case Code (Imperial)=0805, Case Code (Metric)=2012, Dielectric=X7R, Dielectric Material=Ceramic, Manufacturer=KEMET, Max Operating Temperature=125°C, Min Operating Temperature=-55°C, Package Quantity=4000, Supplier Part Number 1=399-C0805C104K5RAC7800TR-ND, Tolerance=10%, Voltage=500V, Voltage Rating=50V, Capacitance=100nF, Case/Package=0805, Category="Ceramic Capacitors", ComponentLink1Description=https://datasheet.ciiva.com/32431/slceramic-chip-condensers-e-32431755.pdf?src-supplier=Distrelec, ComponentLink1URL=https://datasheet.ciiva.com/32431/slceramic-chip-condensers-e-32431755.pdf?src-supplier=Distrelec, ComponentLink2Description=https://datasheet.ciiva.com/28682/1851736-28682232.pdf?src-supplier=Element14, ComponentLink2URL=https://datasheet.ciiva.com/28682/1851736-28682232.pdf?src-supplier=Element14, ComponentLink3Description=https://datasheet.ciiva.com/18410/70095383-18410815.pdf?src-supplier=Allied+Electronics, ComponentLink3URL=https://datasheet.ciiva.com/18410/70095383-18410815.pdf?src-supplier=Allied+Electronics, ComponentLink4Description=https://datasheet.ciiva.com/14589/70095383-14589048.pdf?src-supplier=Allied+Electronics, ComponentLink4URL=https://datasheet.ciiva.com/14589/70095383-14589048.pdf?src-supplier=Allied+Electronics, Construction=Flat, Contact Plating=Tin,Matte, Depth=1.25mm, Height=0.9mm, Lead Pitch=0.75mm, Length=2mm, Manufacturer Part Number=C0805C104K5RACTU, Mount="Surface Mount,PCB", Number of Pins=2, Packaging="Tape and Reel", Pricing 1="4000=0.02554 (USD)", Radiation Hardening=No, REACH SVHC="No SVHC", RoHS=Yes, RoHS Compliant=Yes, Series=C0805C, Stock 1=398862, Supplier 1=Digi-Key, Termination=SMD/SMT, Thickness=0.035inch, Voltage Rating (DC)=50V, Width=1.2mm
C8: library part C0805C224K5RACTU, "0805 C 220nF Ceramic Multilayer Capacitor; 50 VDC; +125degC; X7R Dielec; +/-10%", Case Code (Imperial)=0805, Case Code (Metric)=2012, Dielectric=X7R, Dielectric Material=Ceramic, Manufacturer=KEMET, Max Operating Temperature=125°C, Min Operating Temperature=-55°C, Package Quantity=1, Supplier Part Number 1=399-C0805C224K5RAC7800TR-ND, Tolerance=10%, Voltage=50V, Capacitance=220nF, Case/Package=0805, Category="Ceramic Capacitors", ComponentLink1Description=https://datasheet.ciiva.com/18193/getdatasheetpartid-304413-18193686.pdf?src-supplier=Verical, ComponentLink1URL=https://datasheet.ciiva.com/18193/getdatasheetpartid-304413-18193686.pdf?src-supplier=Verical, ComponentLink2Description=https://datasheet.ciiva.com/14589/70095383-14589519.pdf?src-supplier=Allied+Electronics, ComponentLink2URL=https://datasheet.ciiva.com/14589/70095383-14589519.pdf?src-supplier=Allied+Electronics, ComponentLink3Description=https://datasheet.ciiva.com/14603/70095383-14603247.pdf?src-supplier=Allied+Electronics, ComponentLink3URL=https://datasheet.ciiva.com/14603/70095383-14603247.pdf?src-supplier=Allied+Electronics, ComponentLink4Description=https://datasheet.ciiva.com/7842/kem-c1002-x7r-smd-7842582.pdf?src-supplier=Element14, ComponentLink4URL=https://datasheet.ciiva.com/7842/kem-c1002-x7r-smd-7842582.pdf?src-supplier=Element14, ComponentLink5Description=https://datasheet.ciiva.com/28682/1851736-28682316.pdf?src-supplier=Element14, ComponentLink5URL=https://datasheet.ciiva.com/28682/1851736-28682316.pdf?src-supplier=Element14, Construction=Flat, Depth=1.25mm, Dissipation Factor=2.5%, Height=1.1mm, Lead Pitch=0.75mm, Length=2mm, Manufacturer Part Number=C0805C224K5RACTU, Mount="Surface Mount,PCB", Packaging="Tape and Reel", Pricing 1="2500=0.03216 (USD)", Radiation Hardening=No, REACH SVHC="No SVHC", RoHS=Yes, RoHS Compliant=Yes, Series=C, Stock 1=689249, Supplier 1=Digi-Key, Termination=SMD/SMT, Thickness=0.055inch, Voltage Rating=50V, Voltage Rating (DC)=50V, Width=0.049inch
C9 C10: library part T530X337M010AHE004, "Cap Tant Solid 330uF 10V X CASE 20% (7.3 X 4.3 X 4mm) SMD 7343-43 0.004 Ohm 125 C T/R", Capacitance=330uF, Case Code (Imperial)=2917, Case Code (Metric)=7343, ESR (Equivalent Series Resistance)=4mR, Manufacturer=KEMET, Max Operating Temperature=125°C, Min Operating Temperature=-55°C, Package Quantity=1, Supplier Part Number 1=399-10376-1-ND, Tolerance=20%, Voltage Rating=10V, Case/Package=2917, Category="Tantalum Capacitors", ComponentLink1Description=https://datasheet.ciiva.com/11214/datasheetpn-t530x337m010ahe004-11214039.pdf?src-supplier=Avnet, ComponentLink1URL=https://datasheet.ciiva.com/11214/datasheetpn-t530x337m010ahe004-11214039.pdf?src-supplier=Avnet, Construction=Flat, Depth=4.3mm, Dissipation Factor=8%, Features="General Purpose", Height=4.3mm, Height - Seated (Max)=0.169inch, Length=7.3mm, Life (Hours)=2000Hour, Manufacturer Part Number=T530X337M010AHE004, Mount="Surface Mount", Packaging="Tape and Reel", Pricing 1="1=7.46000, 10=6.63600, 50=5.80600, 100=5.30840 (USD)", RoHS=No, RoHS Compliant=No, Series="KO-CAP T530", Stock 1=720, Supplier 1=Digi-Key, Termination=SMD/SMT, Voltage Rating (DC)=10V, Width=0.169inch
C11: library part C0805C103K5RACTU, "Cap Ceramic 0.01uF 50V X7R 10% SMD 0805 125C Plastic T/R", Case Code (Imperial)=0805, Case Code (Metric)=2012, Dielectric=X7R, Manufacturer=KEMET, Max Operating Temperature=125°C, Min Operating Temperature=-55°C, Package Quantity=4000, Supplier Part Number 1=399-1158-1-ND, Tolerance=10%, Voltage=50V, Capacitance=10nF, Case/Package=0805, Category="Ceramic Capacitors", ComponentLink1Description=http://components.arrow.com/part/dataview/0323_00011329?src-supplier=Arrow+Europe, ComponentLink1URL=http://components.arrow.com/part/dataview/0323_00011329?src-supplier=Arrow+Europe, ComponentLink2Description=http://www.farnell.com/datasheets/2740682.pdf?src-supplier=Farnell, ComponentLink2URL=http://www.farnell.com/datasheets/2740682.pdf?src-supplier=Farnell, ComponentLink3Description=http://www.onlinecomponents.com/productFiles/mf-KEM/kem_c1002_x7r_smd.pdf?src-supplier=Onlinecomponents.com, ComponentLink3URL=http://www.onlinecomponents.com/productFiles/mf-KEM/kem_c1002_x7r_smd.pdf?src-supplier=Onlinecomponents.com, ComponentLink4Description=https://www.verical.com/server-webapp/html/getDatasheet?partID=293414&src-supplier=Verical, ComponentLink4URL=https://www.verical.com/server-webapp/html/getDatasheet?partID=293414&src-supplier=Verical, ComponentLink5Description=https://api.kemet.com/component-edge/download/datasheet/C0805C103K5RACTU.pdf?src-supplier=Digi-Key, ComponentLink5URL=https://api.kemet.com/component-edge/download/datasheet/C0805C103K5RACTU.pdf?src-supplier=Digi-Key, ComponentLink6Description=http://www.farnell.com/datasheets/2740682.pdf?src-supplier=Newark, ComponentLink6URL=http://www.farnell.com/datasheets/2740682.pdf?src-supplier=Newark, ComponentLink7Description=http://www.farnell.com/datasheets/2740682.pdf?src-supplier=Element14, ComponentLink7URL=http://www.farnell.com/datasheets/2740682.pdf?src-supplier=Element14, ComponentLink8Description=http://www.kemet.com/Lists/ProductCatalog/Attachments/53/KEM_C1002_X7R_SMD.pdf?src-supplier=Avnet, ComponentLink8URL=http://www.kemet.com/Lists/ProductCatalog/Attachments/53/KEM_C1002_X7R_SMD.pdf?src-supplier=Avnet, Construction=Flat, Contact Plating=Tin,Matte, Depth=1.25mm, Height=0.78mm, Lead Pitch=0.75mm, Length=2mm, Manufacturer Part Number=C0805C103K5RACTU, Mount="Surface Mount", Packaging="Tape and Reel", Pricing 1="1=0.12000, 10=0.08700, 50=0.04920, 100=0.04080, 500=0.02862, 1000=0.02369 (USD)", Radiation Hardening=No, RoHS=Yes, Stock 1=858335, Supplier 1=Digi-Key, Termination=SMD/SMT, Voltage Rating=50V, Voltage Rating (DC)=50V, Width=1.2mm
J1 J2 J3 J4 J5 J6: library part PAD_WITH_HOLE_4MMx1MM5, "Pad with a hole 4mmx1.5mm"
L1: library part DR125-3R3-R, "Inductor Power Shielded Drum Core 3.3uH 20% 100KHz Ferrite 9.26A 6.3mOhm DCR T/R", Case/Package=Nonstandard, Current Rating=9.26A, DC Resistance (DCR)=6.3mR, Inductance=3.3uH, Inductance Tolerance=20%, Manufacturer="Eaton Cooper", Max Operating Temperature=125°C, Min Operating Temperature=-40°C, Package Quantity=600, Resistor Type=Wirewound, Saturation Current=12.7A, Self Resonant Frequency=100kHz, Supplier Part Number 1=513-1529-1-ND, Category="Fixed Inductors", ComponentLink1Description=https://datasheet.ciiva.com/26858/getdatasheetpartid-251124-26858392.pdf?src-supplier=Verical, ComponentLink1URL=https://datasheet.ciiva.com/26858/getdatasheetpartid-251124-26858392.pdf?src-supplier=Verical, ComponentLink2Description=https://datasheet.ciiva.com/5707/87246-5707962.pdf?src-supplier=Farnell, ComponentLink2URL=https://datasheet.ciiva.com/5707/87246-5707962.pdf?src-supplier=Farnell, ComponentLink3Description=https://datasheet.ciiva.com/30081/4a32919a-7470-4ae0-be45-b59e3a1351ef-30081146.pdf?src-supplier=Onlinecomponents.com, ComponentLink3URL=https://datasheet.ciiva.com/30081/4a32919a-7470-4ae0-be45-b59e3a1351ef-30081146.pdf?src-supplier=Onlinecomponents.com, ComponentLink4Description=https://datasheet.ciiva.com/16295/bus-elx-ds-4315-dr-series-16295562.pdf?src-supplier=Future+Electronics, ComponentLink4URL=https://datasheet.ciiva.com/16295/bus-elx-ds-4315-dr-series-16295562.pdf?src-supplier=Future+Electronics, Core Material=Ferrite, Depth=12.5mm, Height=6mm, Height - Seated (Max)=0.236inch, Length=12.5mm, Manufacturer Part Number=DR125-3R3-R, Max DC Current=9.26A, Military Standard=Not, Mount="Surface Mount", Number of Pins=2, Packaging="Tape and Reel", Pricing 1="1=1.35000, 10=1.25100, 25=1.15520, 50=0.96240, 100=0.90480, 250=0.80848 (USD)", Radiation Hardening=No, Rated Current-Max=9.26A, REACH SVHC="No SVHC", RMS Current (Irms)=9.26A, RoHS=Yes, Series=DR, Shielding=Shielded, Stock 1=1499, Supplier 1=Digi-Key, Termination=SMD/SMT, Test Frequency=100kHz, Tolerance=20%, Weight=0.144oz, Width=0.492inch
L2: library part DR125-2R2-R, "FIXED IND 2.2UH 10.9A 4.5 MOHM", Case/Package=Nonstandard, Current Rating=10.9A, DC Resistance (DCR)=4.5mR, Inductance=2.2uH, Inductance Tolerance=20%, Manufacturer="Eaton Cooper", Max Operating Temperature=125°C, Min Operating Temperature=-40°C, Package Quantity=600, Resistor Type=Wirewound, Saturation Current=15A, Self Resonant Frequency=100kHz, Supplier Part Number 1=513-1662-1-ND, Category="Fixed Inductors", ComponentLink1Description=https://datasheet.ciiva.com/14667/0900766b8116a153-14667792.pdf?src-supplier=RSComponents, ComponentLink1URL=https://datasheet.ciiva.com/14667/0900766b8116a153-14667792.pdf?src-supplier=RSComponents, ComponentLink2Description=https://datasheet.ciiva.com/26926/getdatasheetpartid-571249-26926912.pdf?src-supplier=Verical, ComponentLink2URL=https://datasheet.ciiva.com/26926/getdatasheetpartid-571249-26926912.pdf?src-supplier=Verical, ComponentLink3Description=https://datasheet.ciiva.com/8004/87246-8004874.pdf?src-supplier=Element14, ComponentLink3URL=https://datasheet.ciiva.com/8004/87246-8004874.pdf?src-supplier=Element14, Core Material=Ferrite, DC Current=10.9A, Depth=12.5mm, Height=6mm, Height - Seated (Max)=0.236inch, Lead Free="Lead Free", Length=12.5mm, Manufacturer Part Number=DR125-2R2-R, Max DC Current=10.9A, Military Standard=Not, Mount="Surface Mount", Number of Pins=2, Packaging="Tape and Reel", Pricing 1="1=1.35000, 10=1.25100, 25=1.15520, 50=0.96240, 100=0.90480, 250=0.80848 (USD)", Radiation Hardening=No, Rated Current-Max=10.9A, REACH SVHC="No SVHC", RMS Current (Irms)=10.9A, RoHS=Yes, RoHS Compliant=Yes, Series=DR, Shielding=Shielded, Supplier 1=Digi-Key, Termination=SMD/SMT, Test Frequency=100kHz, Tolerance=20%, Weight=0.144oz, Width=0.492inch
Q1 Q2: "Trans Mosfet N-ch 30V 5.8A/8.2A 8-PIN SOIC N T/r", Case/Package=SO, Continuous Drain Current (ID)=8.2A, Drain to Source Resistance=11.5mR, Drain to Source Voltage (Vdss)=30V, Drain-source On Resistance-Max=18.5mR, Gate to Source Voltage (Vgs)=20V, Manufacturer="Vishay Siliconix", Max Operating Temperature=150°C, Max Power Dissipation=1.25W, Min Operating Temperature=-55°C, Package Quantity=1, Supplier Part Number 1=SI4816BDY-T1-E3CT-ND, Threshold Voltage=1V, Category=MOSFETs, ComponentLink1Description=https://datasheet.ciiva.com/15137/getdatasheetpartid-99188-15137841.pdf?src-supplier=Verical, ComponentLink1URL=https://datasheet.ciiva.com/15137/getdatasheetpartid-99188-15137841.pdf?src-supplier=Verical, ComponentLink2Description=https://datasheet.ciiva.com/7710/si4816bd-7710449.pdf?src-supplier=Element14, ComponentLink2URL=https://datasheet.ciiva.com/7710/si4816bd-7710449.pdf?src-supplier=Element14, ComponentLink3Description=https://datasheet.ciiva.com/26789/si4816bdy-t1-e3-26789112.pdf?src-supplier=IIIC, ComponentLink3URL=https://datasheet.ciiva.com/26789/si4816bdy-t1-e3-26789112.pdf?src-supplier=IIIC, ComponentLink4Description=https://datasheet.ciiva.com/928/si4816bd-928458.pdf?src-supplier=Digi-Key, ComponentLink4URL=https://datasheet.ciiva.com/928/si4816bd-928458.pdf?src-supplier=Digi-Key, ComponentLink5Description=https://datasheet.ciiva.com/928/si4816bd-928459.pdf?src-supplier=Digi-Key, ComponentLink5URL=https://datasheet.ciiva.com/928/si4816bd-928459.pdf?src-supplier=Digi-Key, ComponentLink6Description=https://datasheet.ciiva.com/928/si4816bd-928460.pdf?src-supplier=Digi-Key, ComponentLink6URL=https://datasheet.ciiva.com/928/si4816bd-928460.pdf?src-supplier=Digi-Key, ComponentLink7Description=https://datasheet.ciiva.com/11161/si4816bd-11161496.pdf?src-supplier=Avnet, ComponentLink7URL=https://datasheet.ciiva.com/11161/si4816bd-11161496.pdf?src-supplier=Avnet, ComponentLink8Description=https://datasheet.ciiva.com/26136/si4816bd-26136990.pdf?src-supplier=Avnet+Europe, ComponentLink8URL=https://datasheet.ciiva.com/26136/si4816bd-26136990.pdf?src-supplier=Avnet+Europe, ComponentLink9Description=https://datasheet.ciiva.com/16486/si4816bd-16486349.pdf?src-supplier=Future+Electronics, ComponentLink9URL=https://datasheet.ciiva.com/16486/si4816bd-16486349.pdf?src-supplier=Future+Electronics, ComponentLink10Description=https://datasheet.ciiva.com/18448/70026226-18448822.pdf?src-supplier=Allied+Electronics, ComponentLink10URL=https://datasheet.ciiva.com/18448/70026226-18448822.pdf?src-supplier=Allied+Electronics, Element Configuration=Single, Fall Time=9ns, FET Type="2 N-Channel", Height=1.55mm, Lead Free="Lead Free", Length=5mm, Manufacturer Part Number=SI4816BDY-T1-E3, Mount="Surface Mount", Nominal Vgs=3V, Number of Channels=2, Number of Elements=2, Number of Pins=8, On-State Resistance=18.5mR, Packaging="Tape and Reel", Polarity=N-CHANNEL, Pricing 1="1=1.72000, 10=1.54500, 100=1.24180, 500=1.02024, 1000=0.87450 (USD)", Radiation Hardening=No, Rds On Max=18.5mR, REACH SVHC=Unknown, Rise Time=9ns, RoHS=Yes, RoHS Compliant=Yes, Series="LITTLE FOOT®", Supplier 1=Digi-Key, Turn-Off Delay Time=31ns, Turn-On Delay Time=13ns, Weight=0.006596oz, Width=4mm
R1 R2 R13 R15: library part AC0805JR-070RL, "Fixed Resistor, Metal Glaze/thick Film, 0.125W, 0ohm, Surface Mount, 0805", Case Code (Imperial)=0805, Case Code (Metric)=2012, Manufacturer=Yageo, Max Operating Temperature=155°C, Max Power Dissipation=125mW, Min Operating Temperature=-55°C, Resistance=0R, Resistor Type="Thick Film", Supplier Part Number 1=YAG3755CT-ND, Temperature Coefficient=200ppm/°C, Tolerance=5%, Voltage Rating=150V, Case/Package=0805, Category="Chip SMD Resistors", ComponentLink1Description=http://www.yageo.com/NewPortal/yageodocoutput?fileName=/pdf/R-Chip/PYu-AC_51_RoHS_L_6.pdf&src-supplier=Digi-Key, ComponentLink1URL=http://www.yageo.com/NewPortal/yageodocoutput?fileName=/pdf/R-Chip/PYu-AC_51_RoHS_L_6.pdf&src-supplier=Digi-Key, ComponentLink2Description=http://www.yageo.com/documents/recent/PYu-AC_51_RoHS_L_2.pdf?src-supplier=Mouser, ComponentLink2URL=http://www.yageo.com/documents/recent/PYu-AC_51_RoHS_L_2.pdf?src-supplier=Mouser, Features="Moisture Resistant,Automotive AEC-Q200", Height=0.024inch, Lead Free="Lead Free", Length=0.079inch, Manufacturer Part Number=AC0805JR-070RL, Number of Terminations=2, Packaging="Tape and Reel", Power Rating=125mW, Pricing 1="1=0.10000, 10=0.03700, 25=0.02680, 50=0.02040, 100=0.01500, 250=0.01148, 500=0.00918, 1000=0.00676 (USD)", RoHS=Yes, Series=AC, Stock 1=14475, Supplier 1=Digi-Key, Termination=SMD/SMT, Width=1.25mm
R3: library part AC0805FR-0710RL, "Res Thick Film 0805 10 Ohm 1% 0.125W(1/8W) ±200ppm/C Pad SMD Automotive T/R", Case Code (Imperial)=0805, Case Code (Metric)=2012, Manufacturer=Yageo, Max Operating Temperature=155°C, Max Power Dissipation=125mW, Min Operating Temperature=-55°C, Resistor Type="Thick Film", Supplier Part Number 1=YAG3690CT-ND, Temperature Coefficient=200ppm/°C, Tolerance=1%, Voltage Rating=150V, Case/Package=0805, Category="Chip SMD Resistors", ComponentLink1Description=http://www.mouser.com/ds/2/447/yageodocoutput-1111992.pdf?src-supplier=Mouser, ComponentLink1URL=http://www.mouser.com/ds/2/447/yageodocoutput-1111992.pdf?src-supplier=Mouser, ComponentLink2Description=http://components.arrow.com/part/dataview/0323_03350463?src-supplier=Arrow+Europe, ComponentLink2URL=http://components.arrow.com/part/dataview/0323_03350463?src-supplier=Arrow+Europe, ComponentLink3Description=http://www.yageo.com/NewPortal/yageodocoutput?fileName=/pdf/R-Chip/PYu-AC_51_RoHS_L_6.pdf&src-supplier=Digi-Key, ComponentLink3URL=http://www.yageo.com/NewPortal/yageodocoutput?fileName=/pdf/R-Chip/PYu-AC_51_RoHS_L_6.pdf&src-supplier=Digi-Key, ComponentLink4Description=http://www.yageo.com/documents/recent/PYu-AC_51_RoHS_L_2_revised.pdf?src-supplier=Future+Electronics, ComponentLink4URL=http://www.yageo.com/documents/recent/PYu-AC_51_RoHS_L_2_revised.pdf?src-supplier=Future+Electronics, Construction=Rectangular, Depth=1.25mm, Features="Moisture Resistant,Automotive AEC-Q200", Height=0.024inch, Lead Free="Lead Free", Length=2mm, Manufacturer Part Number=AC0805FR-0710RL, Military Standard=Not, Number of Terminations=2, Packaging="Tape and Reel", Power Rating=125mW, Pricing 1="1=0.10000, 10=0.09000, 100=0.03440, 1000=0.01515, 2500=0.01309 (USD)", Resistance=10R, RoHS=Yes, RoHS Compliant=Yes, Series=AC, Size Code=0805, Stock 1=98707, Supplier 1=Digi-Key, Termination=SMD/SMT, Width=1.25mm
R4 R5: library part AC0805FR-071RL, "Res Thick Film 0805 1 Ohm 1% 0.125W(1/8W) ±200ppm/C Pad SMD Automotive T/R", Case Code (Imperial)=0805, Case Code (Metric)=2012, Manufacturer=Yageo, Max Operating Temperature=155°C, Max Power Dissipation=125mW, Min Operating Temperature=-55°C, Resistor Type="Thick Film", Supplier Part Number 1=603-AC0805FR-071RL, Temperature Coefficient=200ppm/°C, Tolerance=1%, Voltage Rating=150V, Case/Package=0805, Category="Chip SMD Resistors", ComponentLink1Description=https://datasheet.ciiva.com/12576/pyu-ac-51-rohs-l-2-12576553.pdf?src-supplier=Mouser, ComponentLink1URL=https://datasheet.ciiva.com/12576/pyu-ac-51-rohs-l-2-12576553.pdf?src-supplier=Mouser, Features="Moisture Resistant,Automotive AEC-Q200", Height=0.024inch, Lead Free="Lead Free", Length=0.079inch, Manufacturer Part Number=AC0805FR-071RL, Number of Terminations=2, Packaging="Tape and Reel", Power Rating=125mW, Pricing 1="1=0.10000, 10=0.09000, 50=0.09000, 100=0.03500, 1000=0.01400, 10000=0.01100 (USD)", Resistance=1R, RoHS=Yes, RoHS Compliant=Yes, Series=AC, Size Code=0805, Stock 1=92, Supplier 1=Mouser, Termination=SMD/SMT, Weight=0.000194oz, Width=0.049inch
R6 R7 R9 R10: library part AC0805FR-07200KL, "Res Thick Film 0805 200K Ohm 1% 0.125W(1/8W) ±100ppm/C Pad SMD Automotive T/R", Case Code (Imperial)=0805, Case Code (Metric)=2012, Manufacturer=Yageo, Max Operating Temperature=155°C, Max Power Dissipation=125mW, Min Operating Temperature=-55°C, Package Quantity=5000, Resistance=200kR, Resistor Type="Thick Film", Supplier Part Number 1=YAG3706CT-ND, Temperature Coefficient=100ppm/°C, Tolerance=1%, Voltage Rating=150V, Case/Package=0805, Category="Chip SMD Resistors", ComponentLink1Description=http://www.mouser.com/ds/2/447/yageodocoutput-1111992.pdf?src-supplier=Mouser, ComponentLink1URL=http://www.mouser.com/ds/2/447/yageodocoutput-1111992.pdf?src-supplier=Mouser, ComponentLink2Description=http://www.yageo.com/NewPortal/yageodocoutput?fileName=/pdf/R-Chip/PYu-AC_51_RoHS_L_6.pdf&src-supplier=Digi-Key, ComponentLink2URL=http://www.yageo.com/NewPortal/yageodocoutput?fileName=/pdf/R-Chip/PYu-AC_51_RoHS_L_6.pdf&src-supplier=Digi-Key, ComponentLink3Description=http://www.yageo.com/documents/recent/PYu-AC_51_RoHS_L_2.pdf?src-supplier=Future+Electronics, ComponentLink3URL=http://www.yageo.com/documents/recent/PYu-AC_51_RoHS_L_2.pdf?src-supplier=Future+Electronics, Features="Moisture Resistant,Automotive AEC-Q200", Height=0.5mm, Lead Free="Lead Free", Length=2mm, Manufacturer Part Number=AC0805FR-07200KL, Number of Terminations=2, Packaging="Cut Tape", Power Rating=125mW, Pricing 1="1=0.10000, 10=0.05000, 100=0.02040, 1000=0.00917, 2500=0.00796 (USD)", RoHS=Yes, RoHS Compliant=Yes, Series=AC, Stock 1=8313, Supplier 1=Digi-Key, Technology="THICK FILM", Termination=SMD/SMT, Weight=0.000194oz, Width=1.25mm
R8 R11: library part AC0805FR-0710KL, "Res Thick Film 0805 10K Ohm 1% 0.125W(1/8W) ±100ppm/C Pad SMD Automotive T/R", Case Code (Imperial)=0805, Case Code (Metric)=2012, Manufacturer=Yageo, Max Operating Temperature=155°C, Max Power Dissipation=125mW, Min Operating Temperature=-55°C, Package Quantity=1, Resistance=10kR, Resistor Type="Thick Film", Supplier Part Number 1=311-10KLGCT-ND, Temperature Coefficient=100ppm/°C, Tolerance=1%, Voltage Rating=150V, Case/Package=0805, Category="Chip SMD Resistors", ComponentLink1Description=https://datasheet.ciiva.com/5558/pyu-ac-51-rohs-l-2-5558347.pdf?src-supplier=Mouser, ComponentLink1URL=https://datasheet.ciiva.com/5558/pyu-ac-51-rohs-l-2-5558347.pdf?src-supplier=Mouser, Construction=Rectangular, Depth=1.25mm, Features="Moisture Resistant,Automotive AEC-Q200,Anti-Sulfur", Height=0.024inch, Lead Free="Lead Free", Length=0.079inch, Manufacturer Part Number=AC0805FR-0710KL, Military Standard=Not, Number of Terminations=2, Packaging="Tape and Reel", Power Rating=125mW, Pricing 1="1=0.10000, 10=0.05000, 100=0.02040, 1000=0.00917, 2500=0.00796 (USD)", RoHS=Yes, RoHS Compliant=Yes, Series=AC, Size Code=0805, Stock 1=3, Supplier 1=Digi-Key, Termination=SMD/SMT, Width=0.049inch
R12 R14 R16 R17 R18: library part RES
U1: "Soft Sw PWM Cntrlr 2-OUT Power Supply Controller 200KHz/300KHz/400KHz/500KHz 32-Pin QFN EP", Case/Package=QFN, Manufacturer=Renesas, Max Operating Temperature=100°C, Min Operating Temperature=-40°C, Supplier Part Number 1=ISL6236AIRZ-ND, ComponentLink1Description=http://www.intersil.com/content/dam/Intersil/documents/isl6/isl6236a.pdf?src-supplier=Digi-Key, ComponentLink1URL=http://www.intersil.com/content/dam/Intersil/documents/isl6/isl6236a.pdf?src-supplier=Digi-Key, Manufacturer Part Number=ISL6236AIRZ, Mount="Surface Mount", Number of Outputs=4, Packaging=Rail/Tube, Pricing 1="1=6.46000, 10=5.80200, 25=5.48560, 100=4.75410, 250=4.51032, 500=4.04708, 1000=3.84100 (USD)", RoHS=Yes, RoHS Compliant=Yes, Stock 1=660, Supplier 1=Digi-Key

## Via types
v1: diameter 0.6, hole 0.3, L1 to L6, tented both sides, 94 vias

## Nets (pads, with @x,y where several pads share a name; then routed paths per layer and width w, separated by ;. In a path a pad name is that pad's centre, name@x,y a point inside that pad or via, vN(x,y) a via of type N, cw(c..) or ccw(c..) an arc to the next point about the centre after c; other vN are vias at no path point)
+1V5: C9.1 J3.1 L1.1 R12.2 U1.10 | length 18.2
  L3 w1: v1@29.977,19.223 v1(29.9,19.3) 32.7,19.3 36.4,15.6 36.4,13.2 v1(37.7,11.9)
  L6 w0.25: U1.10 26.25,21.75 26.9,21.1
  L6 w0.5: 26.9,21.1 27.8,20.2 28.264,20.2 28.314,20.15 28.607,20.15 28.9,19.857 R12.2 28.95,19.3 v1(29.9,19.3)
+1V05: C10.1 J6.1 L2.2 U1.30 | length 18.5
  L3 w1: v1(25.765,28.365) 28.856,28.365 39.042,38.551 v1(39.1,38.551)
  L6 w0.2: U1.30 25.765,27.415 v1(25.765,28.365)
+5_LDO: C1.2 R1.2 U1.7 | length 25.2
  L3 w1: v1(11.8,24.3) 12.1,24.6 18.346,24.6 19.146,23.8 22.1,23.8 23.1,24.8 27.2,24.8 v1(28.9,23.1)
  L6 w0.25: U1.7@27.575,23.74 27.785,23.74 28.2,23.325 28.2,23.289
  L6 w0.5: v1(11.8,24.3) R1.2 ; 28.2,23.289 28.2,21.6 28.4,21.4 C1.2 28.9,21.45 v1(28.9,23.1)
+5_PVCC: C3.2 R1.1 R2.2 R3.1 U1.19 | length 13.3
  L6 w0.3: 20.8,23.6 21.45,24.25 U1.19
  L6 w0.5: R3.1 R2.2 15.15,26.475 R1.1 15.8,24.3 16.7,25.2 18.1,25.2 19.5,23.8 C3.2 20.8,23.6
+5_VCC: C4.2 R3.2 R8.2 R9.1 R10.2 R11.2 R13.2 R16.2 U1.2 U1.3 U1.20 | length 17.1
  L6 w0.2: v1(21.1,24.8) 21.15,24.75 U1.20 ; v1(22.3,16.3) R11.2 ; 28.25,26.25 28.3,26.2
  L6 w0.3: U1.3 U1.2 28.25,26.25
  L6 w0.5: v1(11.8,32.5) R10.2 ; v1(11.825,28.7) R3.2 ; v1(11.9,34.8) R9.1 ; v1(26.695,16.129) 26.698,16.131 26.698,17.448 R13.2 ; R16.2 v1(28.5,36) ; 28.3,26.2 29.2,28.433 29.2,29.55 C4.2 v1(29.15,30.75) ; R8.2 v1(29.65,36.55)
+REF: C12.1 R14.2 U1.1 | length 9.8
  L6 w0.25: U1.1 27.4,27.2
  L6 w0.5: R14.2 29.1,33.8 29.3,33.6 C12.1@29.3,32.95 ; 27.4,27.2 27.8,27.6 27.8,28.293 28,28.493 28,31.65 28.817,32.467 29.117,32.467 C12.1
+VIN: C2.2 C5.2 C6.2 J1.1 Q1.8 Q2.8 R2.1 U1.6 | length 6.2
  L6 w0.2: C2.2 C2.2@30.45,24.1 ; v1@31.35,25 v1(31.4,25)
  L6 w0.3: U1.6 28.75,24.25 29.1,23.9
  L6 w0.5: v1(11.825,26.5) R2.1 ; 29.1,23.9 C2.2 ; C2.2@30.45,24.1 v1@31.35,25
+VREF3: C11.1 R15.2 U1.5 | length 24.1
  L6 w0.3: U1.5 29.116,24.75
  L6 w0.5: R15.2 R15.2@27.4,38.2 ; 29.116,24.75 29.391,25.025 30.125,25.025 30.45,25.35 C11.1
  L6 w0.9: R15.2@27.7,38.2 31.4,38.2 34.5,35.1 34.5,29 33.2,27.7 31,27.7 30.45,27.05 C11.1
EN1: R11.1 U1.14 | length 4.3
  L6 w0.2: R11.1 22.3,19.916 22.784,20.4 23.249,20.4 24.25,21.401 U1.14
"EN LDO": R8.1 U1.4 | length 15.1
  L6 w0.2: U1.4 28.45,25.25 28.925,25.725 29.249,26.828 29.277,26.86 30.25,28.011 30.733,28.533 30.85,28.65 32.384,28.65 33.5,29.766 33.5,34.1 32.5,35.1 R8.1
FB1: R12.1 R13.1 R17.2 U1.11 | length 9.5
  L6 w0.2: U1.11 25.75,21.25 25.942,21.058 25.942,21.056 ; 26.698,20.3 26.7,20.3
  L6 w0.5: 25.942,21.056 26.698,20.3 ; 26.7,20.3 R13.1 26.942,19.35 27.042,19.25 27.042,18.632 27.335,18.339 28.207,18.339 28.5,18.046 28.5,17.55 28.6,17.45 R12.1 R17.2
GND: C1.1 C2.1 C3.1 C4.1 C5.1 C6.1 C9.2 C10.2 C11.2 C12.2 J2.1 J4.1 J5.1 Q1.2 Q1.3 Q2.2 Q2.3 R6.2 R7.1 R17.1 R18.1 U1.8 U1.21 U1.22 U1.29 U1.33 | length 16.9
  L1 w0.2: C9.2@38.495,19.6 C9.2@38.597,19.703
  L6 w0.2: v1(16.662,23.597) 17.597,23.597 C3.1 ; U1.21 U1.33@24.75,25.25 ; U1.22 U1.33@24.25,25.75 ; v1(23.8,26.2) U1.33@24.25,25.75 ; v1(24.943,29.032) 24.918,29.007 24.918,28.332 25.25,28 U1.29 ; U1.33 U1.33@24.75,25.25 ; v1(27.3,21.9) 27.3,23.235 27.315,23.25 U1.8 ; R17.1 R17.1@31.15,19.3 ; U1.33@24.25,25.75 U1.33@24.75,25.25
  L6 w0.5: v1(24.35,31.95) R6.2 ; v1(24.5,16.2) R7.1 ; R18.1 v1(28.45,40.4) ; R17.1@31.15,19.3 v1(34.6,19.3)
  other v1: 7.5,9.5 8.5,9.5 9.687,9.881 9.5,11 7.5,11.5 9.687,11.881 8.5,12.5 7.5,13.5 9.5,14 10.4,14.5 9,15 7.5,15.5 10.4,15.5 37.795,17.475 39.395,17.475 40.361,18.745 36.855,18.771 13.823,20.005 40.361,20.066 36.83,20.168 32.766,21.082 32.766,21.717 33.02,23.597 23.8,23.8 26.1,23.8 33.02,24.232 33.071,25.883 25.1,26 33.071,26.518 37.77,27.915 39.37,27.915 40.335,29.185 36.83,29.21 31.826,29.286 31.826,29.921 40.335,30.505 36.805,30.607 30.556,32.461 30.505,33.172 7.5,33.5 8.5,33.5 9.763,33.957 9.5,35 7.5,35.5 9.763,35.957 8.5,36.5 7.5,37.5 9.5,38 10.4,38.5 9,39 7.5,39.5 10.4,39.5 13.411,43.028 13.423,43.905 13.411,44.831
LGATE1: Q1.4 U1.18 | length 20.9
  L1 w0.5: Q1.4@12.176,13.092 v1@13.398,13.092
  L3 w1: v1(13.4,13.09) 13.4,14.2 12,15.6 12,20 13.065,21.065 15.179,21.065 16.414,22.3 v1(20.4,22.3)
  L6 w0.2: v1(20.4,22.3) 21.85,23.75 U1.18
LGATE2: Q2.4 U1.23 | length 17.4
  L1 w0.5: Q2.4@12.178,37.09 v1(13.4,37.09)
  L3 w1: v1(13.4,37.09) 13.4,33.85 13.4,32.9 20.075,26.225 v1(21.025,26.225)
  L6 w0.2: v1(21.025,26.225) 21.05,26.25 U1.23
NetC7_2: C7.2 R4.1 | length 2.3
  L6 w0.2: C7.2 17.778,18.778 R4.1
NetC8_1: C8.1 R5.2 | length 2.4
  L6 w0.2: C8.1 17.6,27.652 R5.2
NetR4_2: R4.2 U1.17 | length 4
  L6 w0.2: R4.2 19.678,20.861 19.928,21.111 20.211,21.111 22.335,23.235 22.585,23.235 U1.17
NetR5_1: R5.1 U1.24 | length 3.3
  L6 w0.2: R5.1@19.702,27.45 R5.1 20.85,27.5 21.6,26.75 U1.24
NetR6_1: R6.1 U1.31 | length 3.4
  L6 w0.2: R6.1 25.4,29.95 25.4,29.424 25.724,29.1 26.1,29.1 26.365,28.835 26.365,28.116 26.25,28.001 U1.31
NetR7_2: R7.2 U1.12 | length 3.6
  L6 w0.2: R7.2 24.5,19.951 25.25,20.701 U1.12
PHASE1: C7.1 L1.2 Q1.5 Q1.6 Q1.7 U1.16 | length 11.7
  L3 w1: v1(19.1,13.1) 19.1,13.149 19.5,13.549 v1(19.5,16.8)
  L6 w0.2: 22.815,22.6 U1.16
  L6 w0.5: v1(19.5,16.8) C7.1 20.574,18.979 20.574,20.191 22.815,22.6
PHASE2: C8.2 L2.1 Q2.5 Q2.6 Q2.7 U1.25 | length 13.3
  L3 w1: v1(19.3,37.1) 20.4,36 20.4,32.4 v1(19.5,31.5)
  L6 w0.2: 22.7,27.4 U1.25
  L6 w0.5: v1(19.5,31.5) C8.2 20.85,29.8 21.6,29.05 21.6,28.107 22.7,27.4
POK1: R10.1 U1.13 U1.27 | length 34
  L3 w0.2: v1(21.1,31) 21.6,31 26.1,26.5 28.6,26.5 29.4,25.7 30.3,24.8 30.3,22.4 28.7,20.8 v1(24.5,20.8)
  L6 w0.2: R10.1 19.6,32.5 v1(21.1,31) 24.235,27.865 24.235,27.415 U1.27 ; v1(24.5,20.8) 24.75,21.05 U1.13
POK2: R9.2 U1.28 | length 13.4
  L6 w0.2: R9.2 17.884,34.8 19.601,33.084 20.416,33.084 23.034,30.466 23.034,29.651 24.75,27.934 U1.28
REFIN2: R14.1 R15.1 R16.1 R18.2 U1.32 | length 14.1
  L6 w0.2: U1.32 26.75,27.936 26.915,28.101 26.915,28.186
  L6 w0.5: R18.2 25.45,40.35 R15.1 R16.1 R14.1 25.5,33.75 25.5,33 25.7,32.8 26.333,32.8 26.915,32.218 26.915,28.186
UGATE1: Q1.1 U1.15 | length 14.4
  L1 w0.5: Q1.1@12.176,16.902 v1@13.398,16.902
  L3 w1: v1(13.4,16.9) 17.525,16.9 22.125,21.5 v1(23.5,21.5)
  L6 w0.2: v1(23.5,21.5) 23.5,21.608 23.75,21.858 U1.15
UGATE2: Q2.1 U1.26 | length 20.9
  L1 w0.5: Q2.1@12.173,40.905 12.176,40.902 13.398,40.902 v1(13.4,40.9)
  L3 w1: v1(13.4,40.9) 14.4,40.9 16.364,38.936 16.364,32.939 20.803,28.5 v1(22.4,28.5)
  L6 w0.2: v1(22.4,28.5) 22.989,28.5 23.735,27.754 23.735,27.415 U1.26
pads on no net: U1.9

## Polygon pours and split planes (outlines as drawn)
GND on L1 "GND_L01_P028" (solid, pour order 28): 13,16 7.5,16 7,15.5 7,9 7.5,8.5 10.566,8.5 10.566,14 13,14
GND on L1 "GND_L01_P027" (solid, pour order 27): 13,39.998 7.5,39.998 7,39.498 7,32.998 7.5,32.498 10.541,32.498 10.541,37.998 13,37.998
+VIN on L1 "+VIN_L01_P015" (solid, pour order 15): 2.5,41 3.5,42 16,42 17,43 17,45.5 18.771,45.5 18.771,40.665 18.605,40.5 16.5,40.5 16,41 7.5,41 5.5,39 5.5,33 7.5,31 25.5,31 30.5,26 32,26 32,24 29,24 25.5,27.5 13.5,27.5 13.5,26.5 19,21 19,16.5 16.5,16.5 16.5,19.5 11,25 5.5,25 2.5,28
GND on L1 "GND_L01_P021" (solid, pour order 21): 36.398,21.844 36.398,17.018 40.818,17.018 40.818,21.844 36.373,21.844
GND on L1 "GND_L01_P019" (solid, pour order 19): 36.373,32.283 36.373,27.457 40.792,27.457 40.792,32.283 36.347,32.283
GND on L1 "GND_L01_P018" (solid, pour order 18): 15.494,21.26 13.386,21.26 13.386,18.745 15.494,18.745
GND on L1 "GND_L01_P017" (solid, pour order 17): 15.138,45.187 15.138,42.596 13.03,42.596 13.03,45.187
+1V05 on L1 "+1V05_L01_P005" (solid, pour order 5): 30.4,40 30.4,33.8 30.5,33.7 47.4,33.7 47.4,40 37.5,40
+1V5 on L1 "+1V5_L01_P004" (solid, pour order 4): 30.2,16.3 30.2,10.1 30.3,10 47.2,10 47.2,16.3 37.3,16.3
PHASE1 on L1 "PHASE1_L01_P003" (solid, pour order 3): 16.51,16 24.3,16 24.3,10.2 19.1,10.2 16.51,12.79
PHASE2 on L1 "PHASE2_L01_P002" (solid, pour order 2): 16.535,40 24.3,40 24.3,34.2 19.1,34.2 16.535,36.765
GND on L6 "GND_L06_P026" (solid, pour order 26): 31.598,22.2 31.598,20.599 33.172,20.599 33.172,22.2
GND on L6 "GND_L06_P025" (solid, pour order 25): 31.902,24.562 31.902,23.241 33.477,23.241 33.477,24.562
GND on L6 "GND_L06_P024" (solid, pour order 24): 31.902,26.848 31.902,25.527 33.477,25.527 33.477,26.848
GND on L6 "GND_L06_P023" (solid, pour order 23): 30.582,30.277 30.582,28.956 32.156,28.956 32.156,30.277
GND on L6 "GND_L06_P022" (solid, pour order 22): 31.852,33.528 31.852,32.106 30.175,32.106 30.175,33.528 30.201,33.528 30.175,33.528 30.201,33.528
+5_VCC on L4 "+5_VCC_L04_P029" (solid, pour order 29): 8,45 8,7.5 42.5,7.5 42.5,45
GND on L5 (split plane): 49.49,0.51 0.51,0.51 0.51,49.49 49.49,49.49
GND on L2 (split plane): 49.49,0.51 0.51,0.51 0.51,49.49 49.49,49.49

## Other copper
L1:
  text "rsamonte" at 2.842,3.985 h1.2

## Silkscreen, mask and mechanical layers (free items; w line width, h text height)
Top Overlay:
  text "+OUT2" at 41.272,40.383 h1.52
  text "+VIN" at 1.445,33.296 h1.52
  text "GND" at 42.948,25.803 h1.52
  text "GND" at 43.05,22.4 h1.52
  text "GND" at 2.943,21.714 h1.52
  text "+OUT1" at 41.729,7.718 h1.52
Bottom Overlay:
  text "ISL6236A DEMO V1I1" at 39.934,46.172 h2
  text "1" at 28.324,26.032 h0.9
  text "(C) 2019 FEDEVEL" at 48.031,3.023 h1.52
Top Solder:
  text "rsamonte" at 2.842,3.985 h1.2
Board Outline:
  lines w0.5: 0,0.051 0,49.987 -0.025,50.013 49.936,50.013 49.987,49.962 49.987,0.051 49.962,0.025 0.025,0.025

## Text inside footprints (layer, text, board x,y; h text height)
Q1: Top Overlay "1" at 11.141,17.797 h0.9 r270
Q2: Top Overlay "1" at 11.141,41.797 h0.9 r270